# Altium PCB MOTHERBOARD.PcbDoc (part 1 of 3)
Units mil, origin at the board's own origin, x right, y up, seen from the top; angles counter-clockwise.
Board outline 7367.75 x 3037.04 mil, 4 copper layers (Top Layer, Top, Mid-Layer 1, Mid-Layer 2, Bottom Layer, Bottom), stack 18.2 mil thick; 247 components, 239 nets, 1097 pads, 323 vias.
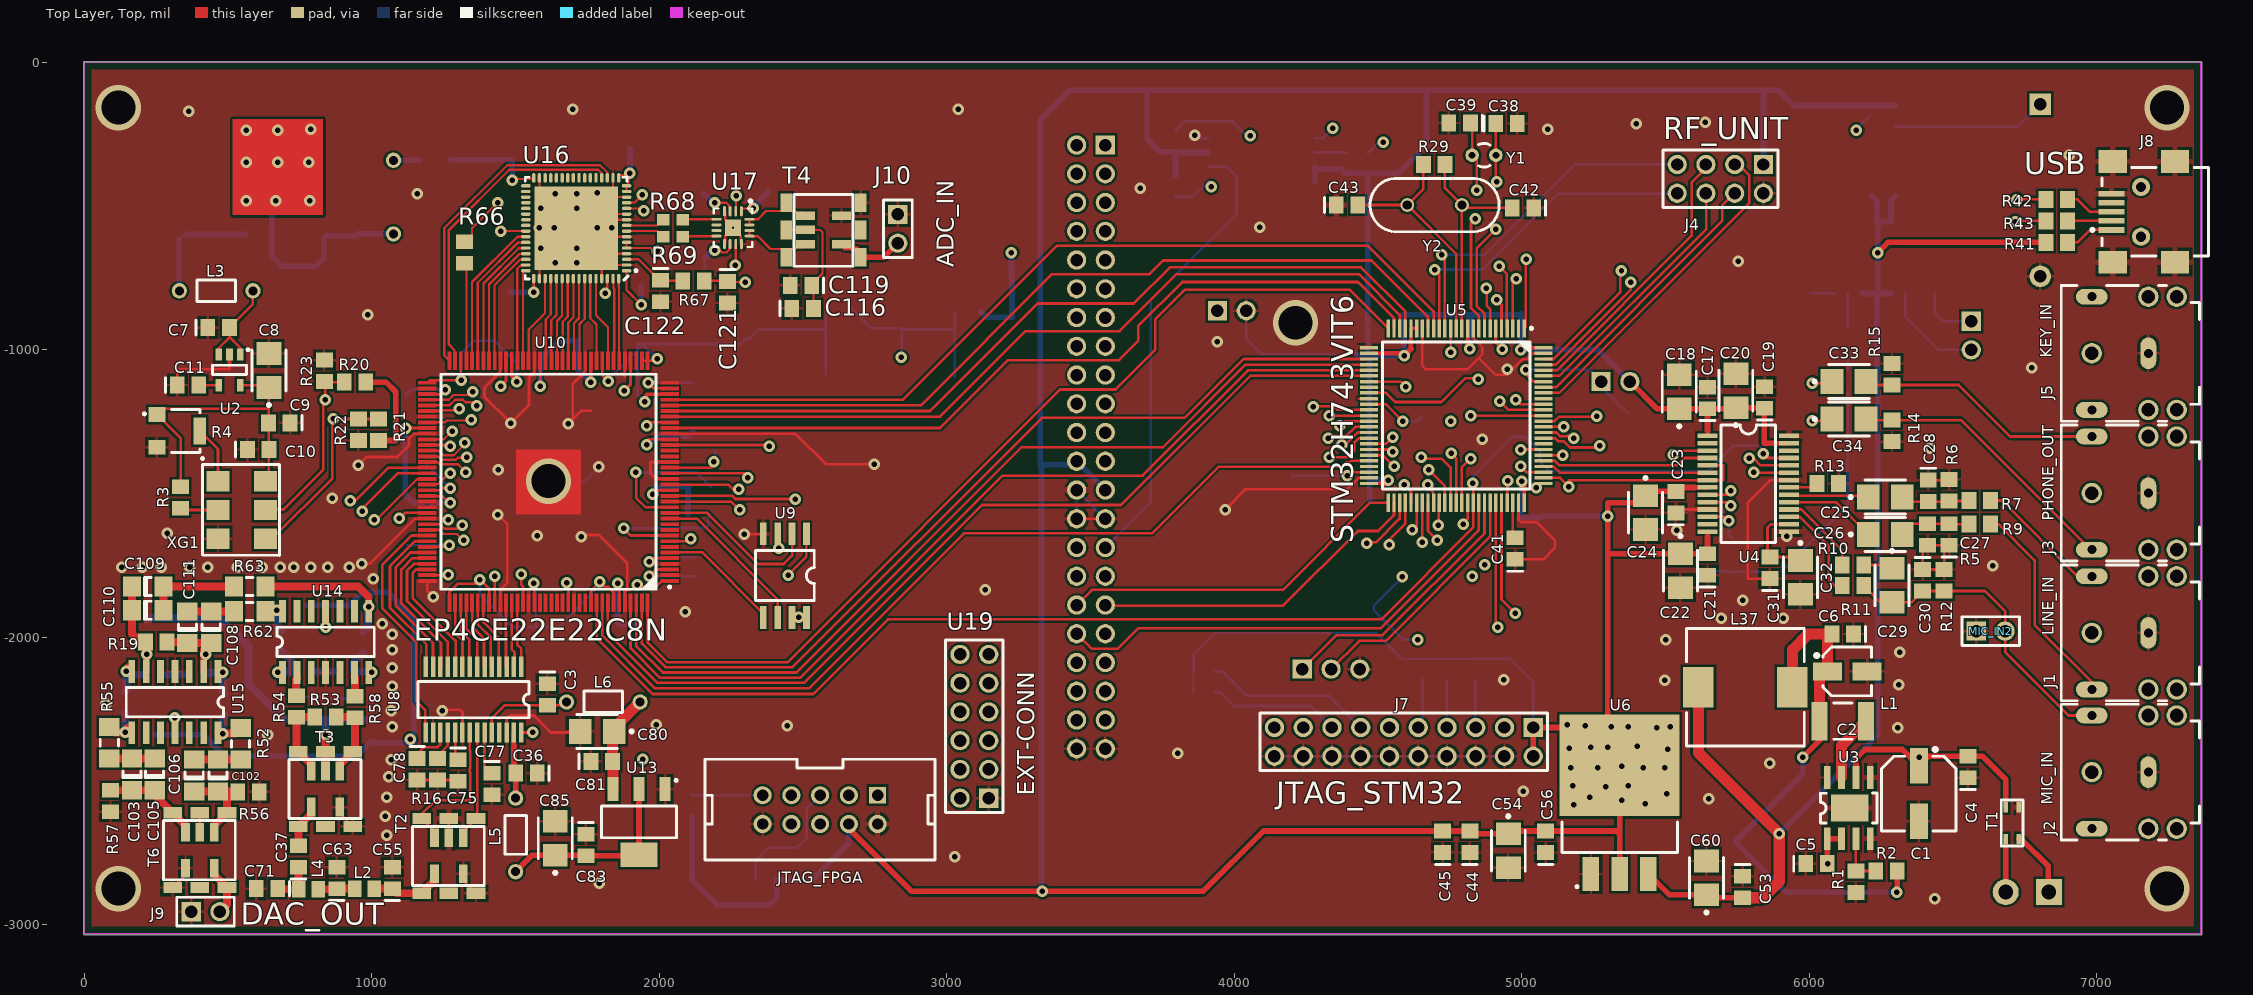
[diagram p0: Top Layer, Top view]
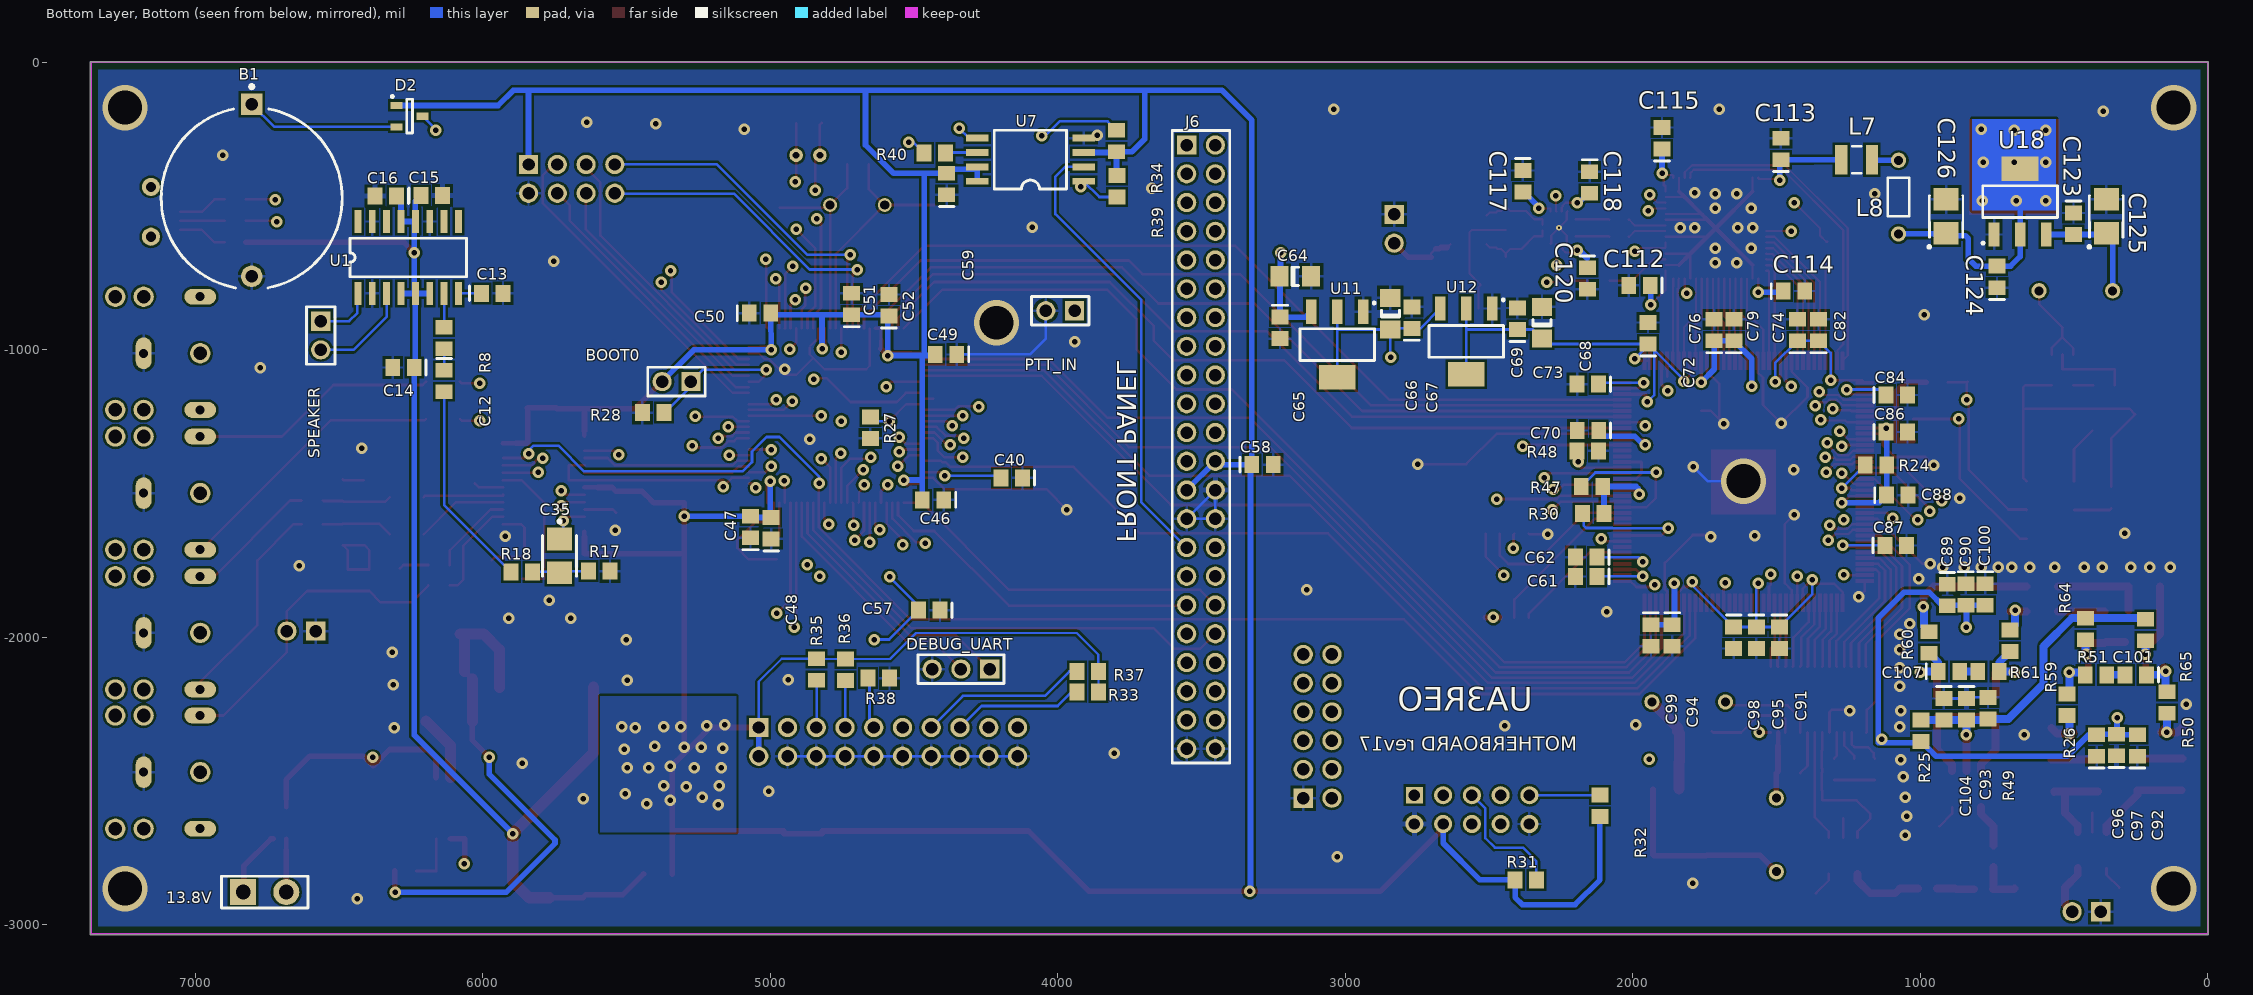
[diagram p1: Bottom Layer, Bottom view, seen from below]
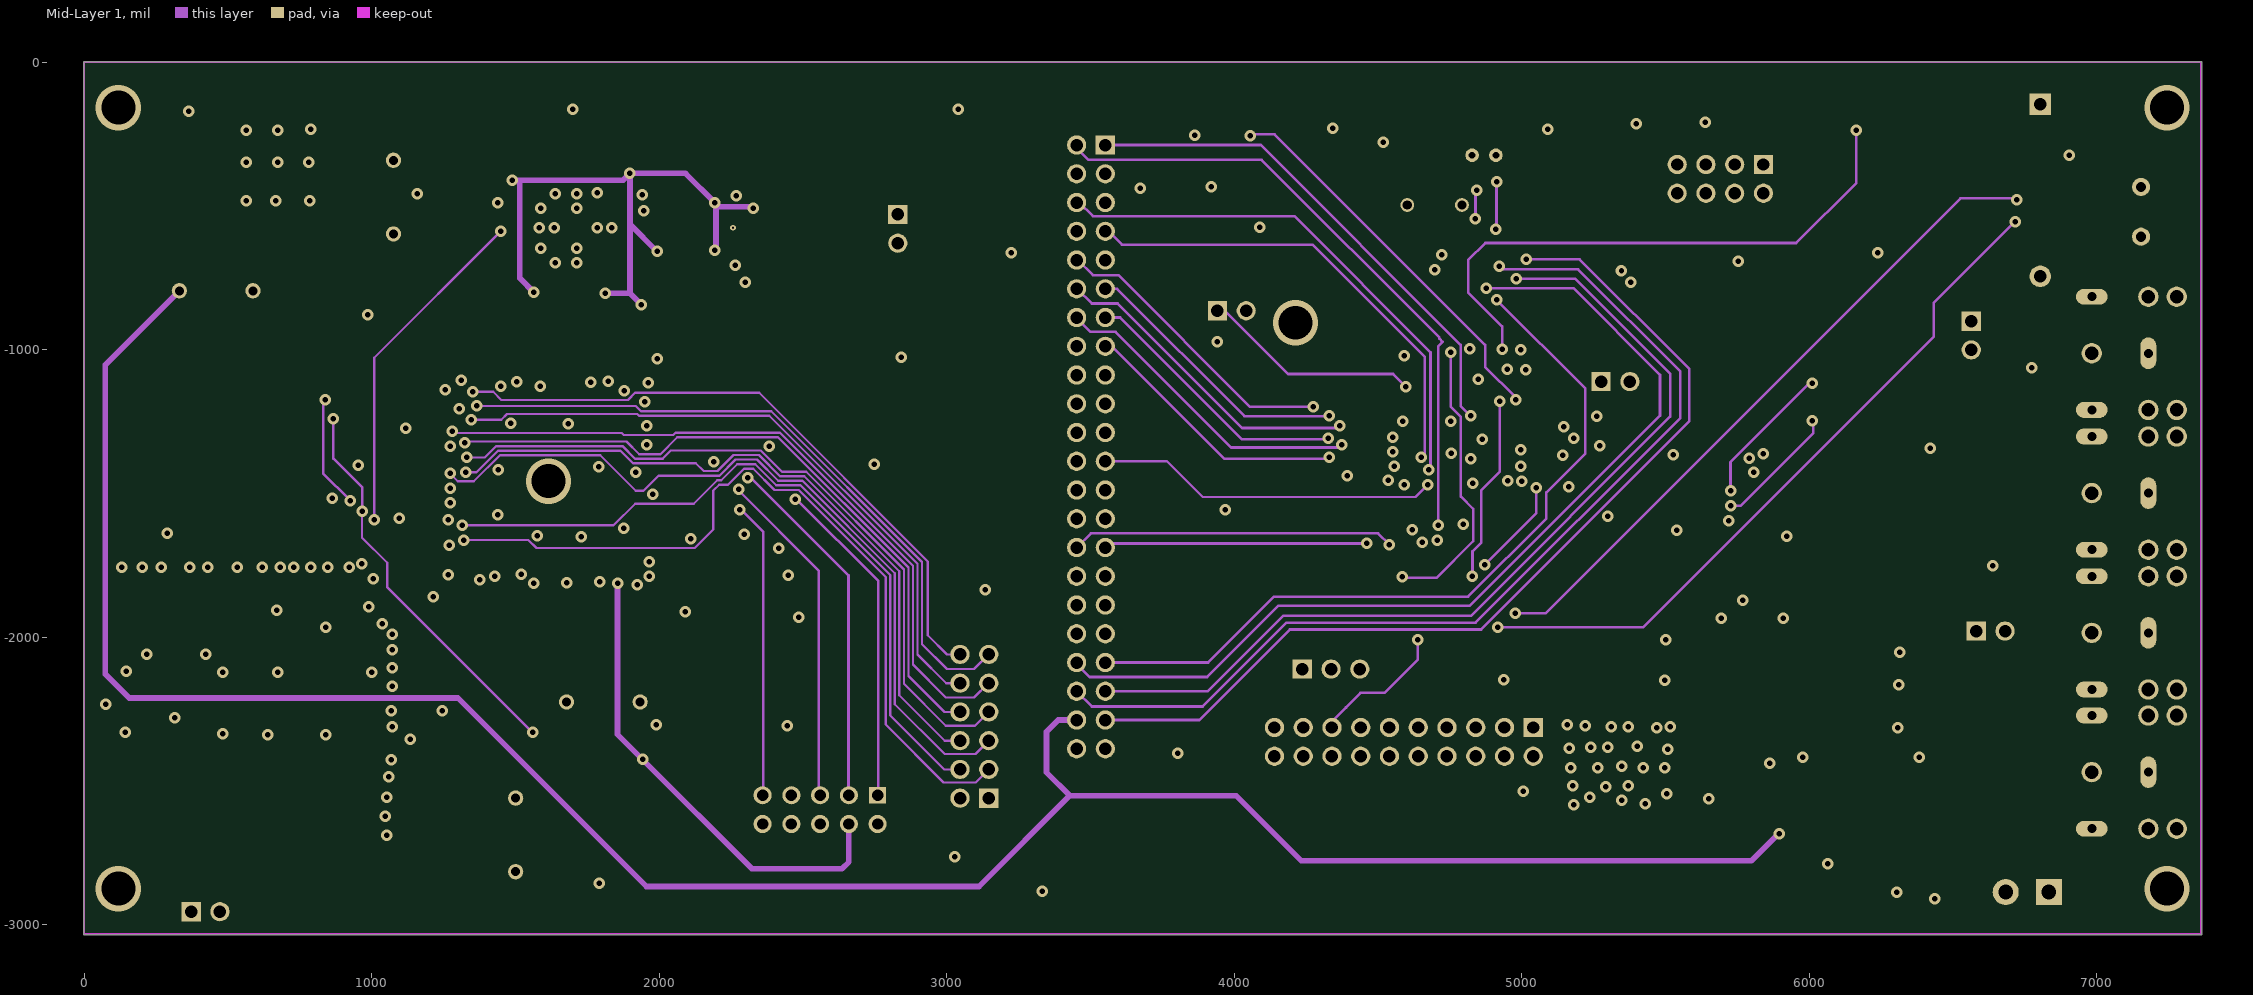
[diagram p2: Mid-Layer 1]
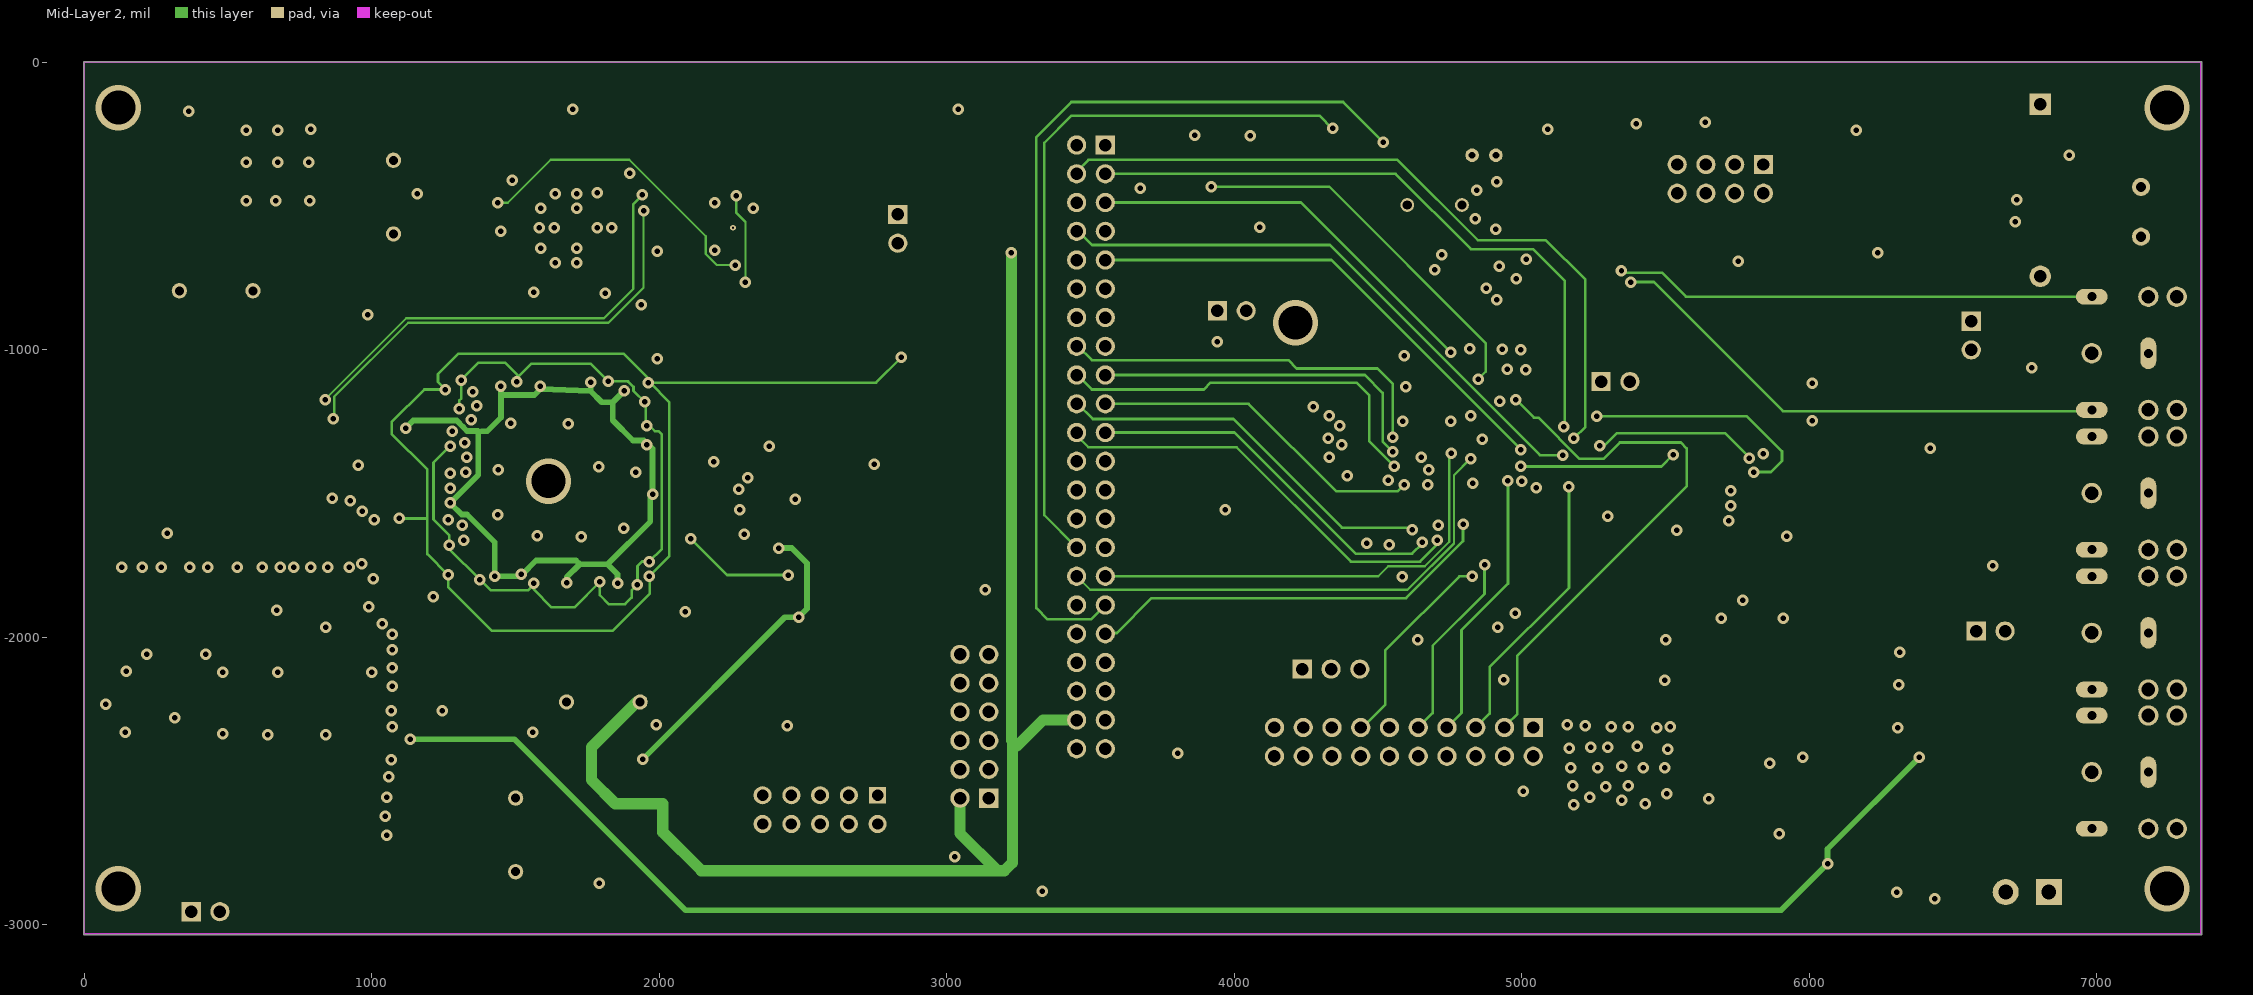
[diagram p3: Mid-Layer 2]

## Layer stack, top to bottom
Top Solder, Top Mask: solder mask 0.4, Solder Resist, Dk 3.5
Top Layer, Top: signal copper 1.4
Dielectric 1: dielectric 12.6, FR-4, Dk 4.8
Mid-Layer 1: signal copper 1.4
Mid-Layer 2: signal copper 1.4
Bottom Layer, Bottom: signal copper 1.4
Bottom Solder, Bot Mask: solder mask 0.4, Solder Resist, Dk 3.5

## Board outline
-2.77,-3031.5 ccw(c0,-3031.5) 0,-3034.27 7362.2,-3034.27 ccw(c7362.2,-3031.5) 7364.98,-3031.5 7364.98,0 ccw(c7362.2,0) 7362.2,2.77 0,2.77 ccw(c0,0) -2.77,0

## Design rules (kind name [scope] priority, off if disabled: settings)
BoardOutlineClearance [All] p1: gap=7.87 ignorepadtopadclearanceinfootprint=FALSE except(15.75: Arc-SplitBarrior Arc-SplitContinuation Track-SplitBarrior Track-SplitContinuation SMDPad-SplitBarrior SMDPad-SplitContinuation THPad-SplitBarrior THPad-SplitContinuation Via-SplitBarrior Via-SplitContinuation Fill-SplitBarrior Fill-SplitContinuation Poly-SplitBarrior Poly-SplitContinuation Region-SplitBarrior Region-SplitContinuation Text-SplitBarrior Text-SplitContinuation)
Clearance "Clearance Bottom Layer" [OnLayer('Bottom Layer')] p1: gap=8 ignorepadtopadclearanceinfootprint=TRUE except(10: Arc-Text Track-Text SMDPad-Text THPad-Text Via-Text Fill-Text Poly-Text Region-Text Text-Text)
Clearance "Clearance Top Layer" [OnLayer('Top Layer')] p2: gap=8 ignorepadtopadclearanceinfootprint=TRUE except(10: Arc-Text Track-Text SMDPad-Text THPad-Text Via-Text Fill-Text Poly-Text Region-Text Text-Text)
Clearance [All] p3: gap=7.87 ignorepadtopadclearanceinfootprint=FALSE except(3.5: Arc-Arc Arc-Track Arc-SMDPad Track-Track Track-SMDPad SMDPad-SMDPad; 5: Arc-Via Track-Via SMDPad-Via THPad-Via Via-Via; 10: Arc-Text Track-Text SMDPad-Text THPad-Text Via-Text Fill-Text Poly-Text Region-Text Text-Text)
HoleSize [All] p1: absolutevalues=TRUE maxlimit=248.03 minlimit=7.87 maxpercent=80.000 minpercent=20.000
MinimumAnnularRing [All] p1: minimumring=3
MinimumSolderMaskSliver [All] p1: minsoldermaskwidth=0.39
PolygonConnect PolygonConnect_1 [All] p1: thpad.connectstyle=Relief thpad.reliefconductorwidth=20 thpad.reliefentries=4 thpad.polygonreliefangle="90 Angle" thpad.airgapwidth=10 smdpad.connectstyle=Relief smdpad.reliefconductorwidth=20 smdpad.reliefentries=4 smdpad.polygonreliefangle="90 Angle" smdpad.airgapwidth=10 via.connectstyle=Direct via.reliefconductorwidth=20 via.reliefentries=4 via.polygonreliefangle="90 Angle" via.airgapwidth=10
RoutingCorners [All] p1: cornerstyle=Round minsetback=100 maxsetback=100
RoutingVias [All] p1: holewidth=19.68 width=39.37 viastyle="Through Hole" minholewidth=7.87 minwidth=17.72 maxholewidth=39.37 maxwidth=78.74
SilkToSilkClearance [All] p1: silktosilkclearance=0.39
SilkToSolderMaskClearance [IsPad] p1: minsilkscreentomaskgap=0.39 clearancetoexposedcopper=TRUE
SolderMaskExpansion [All] p1: expansion=4
Width [All] p1: maxlimit=100 minlimit=3.5 preferedwidth=15
25 further rules are at their usual default settings.

## Components (designator, comment, footprint, x,y, rotation, side; value= is the part's Value field where it differs from the comment)
13.8V "" JX2 6757.87,-2885.83 r180 bottom
B1 "CR1220" BR1632A/FA 6803.15,-428 r270 bottom
BOOT0 "" 51022-0200 5325.59,-1135.24 r0 bottom
C1 "4.7uF 16V" CAPAE_6.6x6.6h5.4 6380.58,-2539.94 r270 top
C2 "22uF 10V" CAPAE_4.3x4.3h5.4#1 6131.89,-2118.11 r0 top
C3 "100n" CAP_0805 1610.24,-2190.93 r270 top
C4 "100n" CAP_0805 6551.18,-2458.67 r90 top
C5 "100n" CAP_0805 6016.48,-2787.23 r0 top
C6 "100n" CAP_0805 6124.03,-1988.19 r180 top
C7 "1uF" CAP_0805 459,-922.36 r0 top
C8 "10uF 10V" CAPAE_4.3x4.3h5.4#2 641.73,-1087.32 r90 top
C9 "100n" CAP_0805 685.86,-1253.57 r180 top
C10 "470pf" CAP_0805 596.44,-1346.46 r0 top
C11 "1uF" CAP_0805 352.66,-1122.24 r0 top
C12 "1uF" CAP_0805 6133.86,-1100.38 r270 bottom
C13 "100n" CAP_0805 5974.42,-803.15 r180 bottom
C14 "1uF" CAP_0805 6267.28,-1061.22 r0 bottom
C15 "1uF" CAP_0805 6185.05,-462.6 r180 bottom
C16 "100n" CAP_0805 6328.73,-464.57 r0 bottom
C17 "100n" CAP_0805 5645.67,-1175.21 r90 top
C18 "10uF 10V" CAPAE_4.3x4.3h5.4#2 5547.24,-1161.42 r90 top
C19 "100n" CAP_0805 5844.49,-1173.24 r90 top
C20 "10uF 10V" CAPAE_4.3x4.3h5.4#2 5744.09,-1157.48 r90 top
C21 "100n" CAP_0805 5645.67,-1753.95 r90 top
C22 "10uF 10V" CAPAE_4.3x4.3h5.4#2 5551.18,-1751.97 r270 top
C23 "100n" CAP_0805 5535.43,-1537.41 r90 top
C24 "10uF 10V" CAPAE_4.3x4.3h5.4#2 5430,-1550 r270 top
C25 "1uF 10V" CAPAE_4.3x4.3h5.4#2 6248.03,-1511.81 r0 top
C26 "1uF 10V" CAPAE_4.3x4.3h5.4#2 6248.03,-1641.73 r0 top
C27 "220pF" CAP_0805 6486.22,-1649.62 r90 top
C28 "220pF" CAP_0805 6413.39,-1482.27 r270 top
C29 "1uF 10V" CAPAE_4.3x4.3h5.4#2 6287.4,-1803.15 r270 top
C30 "220pF" CAP_0805 6393.7,-1793.3 r270 top
C31 "100n" CAP_0805 5862.2,-1765.76 r90 top
C32 "10uF 10V" CAPAE_4.3x4.3h5.4#2 5968.5,-1775.59 r270 top
C33 "220uF 10V" CAPAE_4.3x4.3h5.4#2 6122.05,-1110.24 r0 top
C34 "220uF 10V" CAPAE_4.3x4.3h5.4#2 6122.05,-1240.16 r0 top
C35 "1uF 10V" CAPAE_4.3x4.3h5.4#2 5732.28,-1700.79 r270 bottom
C36 "100n" CAP_0805 1545.29,-2472.44 r180 top
C37 "100n" CAP_0805 744.09,-2769.7 r90 top
C38 "12pF" CAP_0805 4938.96,-212.6 r0 top
C39 "12pF" CAP_0805 4791.35,-210.63 r180 top
C40 "10uF" CAP_0805 4151.54,-1444.88 r0 bottom
C41 "10uF" CAP_0805 4976.38,-1698.83 r90 top
C42 "22pF" CAP_0805 5011.82,-505.91 r180 top
C43 "22pF" CAP_0805 4383.85,-496.06 r0 top
C44 "100nF" CAP_0805 4818.9,-2718.52 r90 top
C45 "100nF" CAP_0805 4724.48,-2718.39 r90 top
C46 "100nF" CAP_0805 4425.22,-1521.52 r0 bottom
C47 "100nF" CAP_0805 5068.06,-1624.23 r90 bottom
C48 "100nF" CAP_0805 4996.06,-1627.96 r90 bottom
C49 "100nF" CAP_0805 4379.91,-1015.75 r0 bottom
C50 "10uF" CAP_0805 5043.32,-872.05 r180 bottom value=1uF
C51 "100nF" CAP_0805 4716.54,-848.44 r90 bottom
C52 "10uF" CAP_0805 4586.61,-852.37 r90 bottom
C53 "100nF" CAP_0805 5767.72,-2860.22 r270 top
C54 "10uF 9V" CAPAE_4.3x4.3h5.4#2 4952.76,-2726.38 r270 top
C55 "120pf" CAP_0805 1070.87,-2844.5 r90 top
C56 "100nF" CAP_0805 5082.68,-2718.52 r90 top
C57 "100nF" CAP_0805 4438.76,-1905.25 r0 bottom
C58 "100nF" CAP_0805 3295.15,-1398.96 r180 bottom
C59 "100nF" CAP_0805 4385.63,-430.92 r90 bottom
C60 "10uF 9V" CAPAE_4.3x4.3h5.4#2 5641.73,-2852.36 r90 top
C61 "100n" CAP_0805 2153.56,-1787.98 r0 bottom
C62 "100n" CAP_0805 2153.56,-1721.06 r0 bottom
C63 "200pf" CAP_0805 877.95,-2844.5 r90 top
C64 "10uF" C0805 3173.23,-744.09 r180 bottom
C65 "100n" CAP_0805 3226.43,-915.37 r270 bottom
C66 "10uF" C0805 2842.52,-874.02 r90 bottom
C67 "100n" CAP_0805 2767.72,-895.66 r90 bottom
C68 "10uF" C0805 2314.96,-905.51 r90 bottom
C69 "100n" CAP_0805 2400.72,-899.59 r90 bottom
C70 "100n" CAP_0805 2147.09,-1280.24 r0 bottom
C71 "120pf" CAP_0805 642.48,-2874.02 r180 top
C72 "100n" CAP_0805 1946.19,-950.08 r90 bottom
C73 "100n" CAP_0805 2147.8,-1119.17 r0 bottom
C74 "100n" CAP_0805 1426.82,-938.94 r90 bottom
C75 "1uF" CAP_0805 1300,-2455 r270 top
C76 "100n" CAP_0805 1716.01,-938.94 r90 bottom
C77 "100n" CAP_0805 1417.32,-2501.96 r270 top
C78 "1uF" CAP_0805 1157.48,-2450.78 r270 top
C79 "100n" CAP_0805 1647.69,-938.94 r90 bottom
C80 "10uF" EEEFC_sizeB 1799.21,-2326.77 r180 top
C81 "100n" CAP_0805 1791.33,-2431.1 r0 top
C82 "100n" CAP_0805 1353.48,-938.94 r90 bottom
C83 "100n" CAP_0805 1744.09,-2714.56 r270 top
C84 "100n" CAP_0805 1088.9,-1156.91 r180 bottom
C85 "100uF" EEEFC_sizeB 1637.8,-2714.57 r90 top
C86 "100n" CAP_0805 1088.9,-1285.33 r180 bottom
C87 "100n" CAP_0805 1092.7,-1680.09 r180 bottom
C88 "100n" CAP_0805 1087,-1505.48 r180 bottom
C89 "100n" CAP_0805 905.51,-1844.48 r270 bottom
C90 "470p" CAP_0805 840.55,-1842.51 r270 bottom
C91 "100n" CAP_0805 1489.42,-1993.43 r270 bottom
C92 "1uF" CAP_0805 244.09,-2383.87 r90 bottom
C93 "100n" CAP_0805 838.58,-2242.11 r270 bottom
C94 "100n" CAP_0805 1862.65,-1985.07 r270 bottom
C95 "100n" CAP_0805 1569.56,-1993.43 r270 bottom
C96 "100n" CAP_0805 385.83,-2383.87 r90 bottom
C97 "470p" CAP_0805 316.93,-2381.9 r90 bottom
C98 "100n" CAP_0805 1648.42,-1993.43 r270 bottom
C99 "100n" CAP_0805 1936.11,-1985.07 r270 bottom
C100 "1uF" CAP_0805 773.62,-1842.51 r270 bottom
C101 "100n" CAP_0805 242.11,-2129.92 r0 bottom
C102 "1uF" CAP_1206 464.57,-2480.32 r90 top
C103 "1uF" CAP_1206 165.35,-2476.38 r90 top
C104 "470p" CAP_0805 917.32,-2242.11 r270 bottom
C105 "680pF" CAP_1206 244.09,-2476.38 r90 top
C106 "680pF" CAP_1206 381.89,-2480.32 r90 top
C107 "100n" CAP_0805 907.49,-2118.11 r180 bottom
C108 "1uF" CAP_1206 440.94,-1964.57 r90 top
C109 "1uF" CAP_1206 220.47,-1822.83 r0 top
C110 "680pF" CAP_1206 220.47,-1905.51 r0 top
C111 "680pF" CAP_1206 358.27,-1964.57 r90 top
C112 "CAP_0805" CAP_0805 1968.5,-775.59 r0 bottom value=100n
C113 "CAP_0805" CAP_0805 1484.25,-309.07 r90 bottom value=100n
C114 "CAP_0805" CAP_0805 1446.86,-795.28 r180 bottom value=100n
C115 "CAP_0805" CAP_0805 1897.64,-271.65 r90 bottom value=100n
C116 "CAP_0805" CAP_0805 2490.33,-855.39 r0 top value=470pF
C117 "CAP_0805" CAP_0805 2381.89,-405.51 r270 bottom value=100n
C118 "CAP_0805" CAP_0805 2149.61,-409.45 r270 bottom value=100n
C119 "CAP_0805" CAP_0805 2500,-775.59 r180 top value=1uF
C120 "CAP_0805" CAP_0805 2157.48,-744.09 r270 bottom value=100n
C121 "CAP_0805" CAP_0805 2236.22,-791.34 r270 top value=1uF
C122 "CAP_0805" CAP_0805 2003.94,-787.4 r270 top value=1uF
C123 "100n" CAP_0805 466.38,-553.14 r270 bottom
C124 "CAP_0805" CAP_0805 732.44,-753.77 r90 bottom value=100n
C125 "22uF" TC3528-1411 352.2,-535.43 r90 bottom
C126 "EEEFC_sizeB" TC3528-1411 909.45,-535.43 r90 bottom value=22uF
D2 "BAT54C" BAT54C 6254.81,-178.56 r180 bottom
DEBUG_UART "" 51022-0300 4336.22,-2135.24 r0 bottom
J1 "LINE_IN" SJ1-3523N 7159,-1984.25 r180 top
J2 "MIC_IN" SJ1-3523N 7159,-2468.5 r180 top
J3 "PHONE_OUT" SJ1-3523N 7159,-1498.03 r180 top
J4 "RF_UNIT" 90131-0124 5690.16,-405.12 r180 top
J5 "KEY_IN" SJ1-3523N 7159,-1011.81 r180 top
J6 "FRONT-UNIT" 90131-0142 3501.18,-1337.4 r270 bottom
J7 "JTAG_STM32" 90131-0130 4589.37,-2363.39 r180 top
J8 "USB" 2-1734035-3 7181.1,-519.69 r90 top
J9 "DAC_OUT" 644456-2 421.26,-2928.94 r0 top
J10 "ADC_IN" 644456-2 2854.33,-578.74 r270 top
JTAG_FPGA "" IDC10 2559.01,-2599 r0 top
L1 "3.3uH" IND_1812 6116.14,-2291.34 r180 top
L2 "330nH" IND_0805 974.41,-2874.02 r180 top
L3 "FB" IND_FERRITE_BEAD 458.13,-794.31 r0 top
L4 "330nH" IND_0805 779.53,-2875.98 r180 top
L5 "FB" IND_FERRITE_BEAD 1500,-2687.01 r270 top
L6 "FB" IND_FERRITE_BEAD 1805.12,-2224.41 r0 top
L7 "IND_1206" 14-1210 1220.47,-338.58 r0 bottom value=100uH
L8 "IND_FERRITE_BEAD" RES6.5-3.4X1.9 1074.8,-468.5 r90 bottom value=FB
L37 "10uH" IND_FERRITE_CORE 5777.56,-2173.23 r0 top
MIС_IN2 "" 51022-0200 6630.6,-1953.08 r0 top (schematic designator MI裚IN2)
PTT_IN "" 51022-0200 3991.04,-888.86 r0 bottom
R1 "10k" RES_0805 6161.85,-2849.73 r90 top
R2 "120k+100k" RES_0805 6268.09,-2812.04 r0 top
R3 "NONE" RES_0805 334.65,-1513.78 r270 top
R4 "1k" EVM1DSX30B 312.02,-1281.5 r0 top
R5 "5.6k" RES_0805 6411.42,-1641.73 r90 top
R6 "5.6k" RES_0805 6486.22,-1488.19 r270 top
R7 "5.6k" RES_0805 6592.52,-1523.62 r180 top
R8 "10k" RES_0805 6133.86,-958.66 r270 bottom
R9 "5.6k" RES_0805 6592.52,-1606.3 r180 top
R10 "10k" RES_0805 6151.57,-1748.03 r180 top
R11 "680" RES_0805 6151.57,-1818.9 r180 top
R12 "47k" RES_0805 6468.5,-1801.18 r270 top
R13 "10k" RES_0805 6064.09,-1464.73 r180 top
R14 "47k" RES_0805 6287.4,-1281.5 r90 top
R15 "47k" RES_0805 6287.4,-1084.65 r270 top
R16 "2k" RES_0805 1228.35,-2458.66 r90 top
R17 "47k" RES_0805 5594.49,-1769.69 r0 bottom
R18 "100" RES_0805 5864.17,-1771.65 r0 bottom
R19 "220" RES_0805 250,-2015.75 r0 top
R20 "127" RES_0805 940.94,-1112.2 r180 top
R21 "127" RES_0805 1023.62,-1277.56 r90 top
R22 "82.5" RES_0805 952.76,-1277.56 r270 top
R23 "82.5" RES_0805 834.65,-1072.83 r90 top
R24 "10k" RES_0805 1153.54,-1399.61 r0 bottom
R25 "1k" RES_0805 996.06,-2324.8 r270 bottom
R26 "470" RES_0805 488.19,-2234.25 r90 bottom
R27 "10k" RES_0805 4651.46,-1270.44 r90 bottom
R28 "10k" RES_0805 5406.74,-1218.37 r180 bottom
R29 "1m" RES_0805 4694.88,-354.33 r180 top
R30 "10k" RES_0805 2136.77,-1569.51 r180 bottom
R31 "10k" RES_0805 2371.83,-2843.27 r0 bottom
R32 "10k" RES_0805 2113.74,-2585.41 r270 bottom
R33 "10k" RES_0805 3895.16,-2190.63 r180 bottom
R34 "10k" RES_0805 3795.08,-273.43 r90 bottom
R35 "10k" RES_0805 4837.89,-2111.28 r270 bottom
R36 "10k" RES_0805 4738.38,-2112.46 r270 bottom
R37 "10k" RES_0805 3895.16,-2118.7 r0 bottom
R38 "10k" RES_0805 4622.05,-2141.73 r0 bottom
R39 "10k" RES_0805 3794,-430.6 r270 bottom
R40 "22" RES_0805 4426.97,-314.76 r0 bottom
R41 "0" RES_0805 6860.24,-625.98 r0 top
R42 "22" RES_0805 6860.24,-476.38 r180 top
R43 "22" RES_0805 6860.24,-551.18 r180 top
R47 "10k" RES_0805 2140.71,-1475.02 r180 bottom
R48 "10k" RES_0805 2155.98,-1350.81 r180 bottom
R49 "1k" RES_0805 763.78,-2246.06 r90 bottom
R50 "470" RES_0805 141.73,-2226.38 r90 bottom
R51 "330" RES_0805 387.8,-2129.92 r180 bottom
R52 "5.6" RES_1206 543.31,-2370.08 r90 top
R53 "220" RES_0805 838.58,-2277.56 r180 top
R54 "22" RES_0805 738.19,-2240.16 r90 top
R55 "5.6" RES_1206 86.61,-2366.14 r90 top
R56 "10k" RES_0805 570.87,-2537.4 r180 top
R57 "10k" RES_0805 90.55,-2568.9 r270 top
R58 "22" RES_0805 940.94,-2242.13 r270 top
R59 "470" RES_0805 687.01,-2011.81 r270 bottom
R60 "470" RES_0805 968.5,-2017.72 r270 bottom
R61 "330" RES_0805 761.81,-2118.11 r0 bottom
R62 "5.6" RES_1206 574.8,-1909.45 r0 top
R63 "5.6" RES_1206 574.8,-1822.83 r0 top
R64 "2k" RES_0805 425.2,-1970.47 r270 bottom
R65 "2k" RES_0805 216.54,-1974.41 r90 bottom
R66 "RES_0805" RES_0805 1322.83,-661.42 r270 top value=1.5k
R67 "RES_0805" RES_0805 2118.11,-759.84 r180 top value=56
R68 "RES_0603" RES_0603 2047.24,-547.24 r180 top value=10
R69 "RES_0603" RES_0603 2047.24,-606.3 r180 top value=10
SPEAKER "" 51022-0200 6537.99,-950 r270 bottom
T1 "ACP3225-501-2P-T" TRANSF_ICORE 6705.12,-2645.28 r270 top
T2 "1:1 T1-6T" TRANSF_ACORE2 1267.72,-2759.84 r270 top
T3 "1:1 ADT1-6T" TRANSF_ACORE2_1 838.58,-2527.56 r270 top
T4 "TRANSF_ACORE2" TRANSF_ACORE2 2570.87,-582.68 r0 top value="1:4 ADT4-6T"
T6 "1:1 ADT1-1" TRANSF_ACORE 401.57,-2740.16 r270 top
U1 "PAM8403" PAM8403 6258.86,-678.54 r90 bottom
U2 "LD3985" LD3985 510.95,-1067.82 r270 top
U3 "ST1S10" ST1S10 6136.85,-2593.47 r90 top
U4 "WM8731" WM8731 5787.41,-1465.55 r0 top
U5 "STM32H743VIT6" STM32H743VIT6 4771.65,-1228.35 r270 top
U6 "LM1085-3.3" LM1085-3.3 5340.16,-2574.8 r90 top
U7 "W25Q16" W25Q16 4094.49,-338.39 r0 bottom
U8 "DAC904E" DAC904E 1353.35,-2216.54 r270 top
U9 "25P80" 25P80 2436.44,-1784.94 r270 top
U10 "EP4CE22E22C8N" EP4CE22E22C8N 1614.17,-1458.66 r180 top
U11 "2V5" AMS1117 3024.22,-981.41 r270 bottom value=AMS1117-2V5
U12 "1V2" AMS1117 2575.41,-970.27 r270 bottom value=AMS1117-1V2
U13 "LD1117-3.3" LT1117CST-3.3 1932.47,-2641.73 r270 top
U14 "OPA2674I" OPA2674I 838.98,-2015.75 r90 top
U15 "OPA2674I" OPA2674I 314.96,-2224.8 r270 top
U16 "LTC2208CUP" LTC2208CUP 1722.56,-576.77 r180 top
U17 "LTC6400IUD-20#PBF" LT-UD-16_N 2255.91,-574.8 r270 top
U18 "LD1117-3.3" LT1117CST-3.3 655.35,-484.25 r90 bottom
U19 "EXT-CONN" EXT-CONN 3095.67,-2309.06 r90 top
XG1 "122.88Mhz" NV7050SA 541.25,-1542.13 r0 top
Y1 "32.768k" R26-32.768 4868.11,-322.83 r90 top
Y2 "8mhz" ECS-200-20-1 4696.34,-496.06 r180 top

## Footprints (in the part's own frame and the unit in brackets; to place one, negate y for a bottom-side part, rotate by r counter-clockwise, add the part's x,y. Pads: shape width x height; smd on the part's side, far side on the other; paste and mask are expansions set on the pad)
2-1734035-3 [mm]
  rect 0.5x2.3 smd: 1(-1.6,3.3) 2(-0.8,3.3) 3(0,3.3) 4(0.8,3.3) 5(1.6,3.3)
  rect 2x2.5 smd: 6(-4.45,3.2) 7(4.45,3.2) 8(-4.45,-2.3) 9(4.45,-2.3)
  round 1.6 hole 0.9: 10(-2.2,0.7) 11(2.201,0.7)
  silkscreen extent -3.9,-5.25 3.9,5.25
14-1210 [mm] "Chip Resistor, Body 3.2x2.5mm, IPC High Density"
  rect 1.1x2.6 smd: 1(-1.35,0) 2(1.35,0)
  silkscreen extent -0.4,-1.2 0.4,1.2, body extent -1.68,-1.32 1.68,1.32, height 0.9
25P80 [mm]
  rect 2x0.6 smd: 1(-3.7,1.905) 2(-3.7,0.635) 3(-3.7,-0.635) 4(-3.7,-1.905) 5(3.7,-1.905) 6(3.7,-0.635) 7(3.7,0.635) 8(3.7,1.905)
  silkscreen extent -2.2,-2.6 2.2,2.6
51022-0200 [mm]
  rect 1.7x1.7 hole 1.1: 1(-1.27,-0.635)
  round 1.7 hole 1.1: 2(1.27,-0.635)
  silkscreen extent -2.54,-1.91 2.54,0.64
51022-0300 [mm]
  rect 1.7x1.7 hole 1.1: 1(-2.54,-0.635)
  round 1.7 hole 1.1: 2(0,-0.635) 3(2.54,-0.635)
  silkscreen extent -3.81,-1.91 3.81,0.64
90131-0124 [mm]
  rect 1.7x1.7 hole 1.1: 1(-3.81,-1.27)
  round 1.7 hole 1.1: 2(-3.81,1.27) 3(-1.27,-1.27) 4(-1.27,1.27) 5(1.27,-1.27) 6(1.27,1.27) 7(3.81,-1.27) 8(3.81,1.27)
  silkscreen extent -5.08,-2.54 5.08,2.54
90131-0130 [mm]
  rect 1.7x1.7 hole 1.1: 1(-11.43,-1.27)
  round 1.7 hole 1.1: 2(-11.43,1.27) 3(-8.89,-1.27) 4(-8.89,1.27) 5(-6.35,-1.27) 6(-6.35,1.27) 7(-3.81,-1.27) 8(-3.81,1.27) 9(-1.27,-1.27) 10(-1.27,1.27) 11(1.27,-1.27) 12(1.27,1.27) 13(3.81,-1.27) 14(3.81,1.27) 15(6.35,-1.27) 16(6.35,1.27) 17(8.89,-1.27) 18(8.89,1.27) 19(11.43,-1.27) 20(11.43,1.27)
  silkscreen extent -12.7,-2.54 12.7,2.54
90131-0142 [mm]
  rect 1.7x1.7 hole 1.1: 1(-26.67,-1.27)
  round 1.7 hole 1.1: 2(-26.67,1.27) 3(-24.13,-1.27) 4(-24.13,1.27) 5(-21.59,-1.27) 6(-21.59,1.27) 7(-19.05,-1.27) 8(-19.05,1.27) 9(-16.51,-1.27) 10(-16.51,1.27) 11(-13.97,-1.27) 12(-13.97,1.27) 13(-11.43,-1.27) 14(-11.43,1.27) 15(-8.89,-1.27) 16(-8.89,1.27) 17(-6.35,-1.27) 18(-6.35,1.27) 19(-3.81,-1.27) 20(-3.81,1.27) 21(-1.27,-1.27) 22(-1.27,1.27) 23(1.27,-1.27) 24(1.27,1.27) 25(3.81,-1.27) 26(3.81,1.27) 27(6.35,-1.27) 28(6.35,1.27) 29(8.89,-1.27) 30(8.89,1.27) 31(11.43,-1.27) 32(11.43,1.27) 33(13.97,-1.27) 34(13.97,1.27) 35(16.51,-1.27) 36(16.51,1.27) 37(19.05,-1.27) 38(19.05,1.27) 39(21.59,-1.27) 40(21.59,1.27) 41(24.13,-1.27) 42(24.13,1.27) 43(26.67,-1.27) 44(26.67,1.27)
  silkscreen extent -27.94,-2.54 27.94,2.54
644456-2 [mm]
  rect 1.7x1.7 hole 1.1: 1(-1.27,-0.635)
  round 1.7 hole 1.1: 2(1.27,-0.635)
  silkscreen extent -2.54,-1.91 2.54,0.64
AMS1117 [mm]
  rect 2.15x0.95 smd: 1(-2.9,2.215) 2(-2.9,-0.085) 3(-2.9,-2.385)
  rect 2.15x3.25 smd: 4(2.9,-0.085)
  silkscreen extent -3.86,-3.38 1.4,3.38
BAT54C [mm]
  rect 1.05x0.65 smd: 1(-1.128,0.735) 2(-1.128,-1.165) 3(1.172,-0.215)
  silkscreen extent -1.7,-1.71 0.27,1.71
BR1632A/FA [mm]
  rect 1.9x1.9 hole 1.1: 1(-7.171,0)
  round 1.9 hole 1.1: 2(8.029,0)
  silkscreen extent -9.03,-8 9.04,8
C0805 [mm]
  rect 1.6x1.8 smd: 1(-1.4,0) 2(1.4,0)
  silkscreen extent -0.3,-0.8 0.3,0.8
CAP_0805 [mm]
  rect 1.3x1.5 smd: 1(-0.75,0) 2(1.15,0)
  silkscreen extent -1.8,-0.65 -1.8,0.65
CAP_1206 [mm]
  rect 1.6x1.8 smd: 1(-1.4,0) 2(1.4,0)
  silkscreen extent -0.3,-0.8 0.3,0.8
CAPAE_4.3x4.3h5.4#1 [mm]
  rect 2.55x1.6 smd: 1(-1.75,0) 2(1.75,0)
  silkscreen extent -3,-2.15 2.15,2.15
CAPAE_4.3x4.3h5.4#2 [mm]
  rect 2x2.2 smd: 1(-1.1,0) 2(1.9,0)
  silkscreen extent -2.9,-1.5 2.2,1.5
CAPAE_6.6x6.6h5.4 [mm]
  rect 3.15x1.6 smd: 1(-2.362,0) 2(2.538,0)
  silkscreen extent -4.11,-3.3 3.39,3.3
DAC904E [mm]
  rect 1.8x0.4 smd: 1(-2.9,4.225) 2(-2.9,3.575) 3(-2.9,2.925) 4(-2.9,2.275) 5(-2.9,1.625) 6(-2.9,0.975) 7(-2.9,0.325) 8(-2.9,-0.325) 9(-2.9,-0.975) 10(-2.9,-1.625) 11(-2.9,-2.275) 12(-2.9,-2.925) 13(-2.9,-3.575) 14(-2.9,-4.225) 15(2.9,-4.225) 16(2.9,-3.575) 17(2.9,-2.925) 18(2.9,-2.275) 19(2.9,-1.625) 20(2.9,-0.975) 21(2.9,-0.325) 22(2.9,0.325) 23(2.9,0.975) 24(2.9,1.625) 25(2.9,2.275) 26(2.9,2.925) 27(2.9,3.575) 28(2.9,4.225)
  silkscreen extent -1.6,-4.9 1.6,4.9
ECS-200-20-1 [mil]
  round 48 hole 32: 1(-95,0) 2(95,0)
  silkscreen extent -225,-93 225,93
EEEFC_sizeB [mm]
  rect 2x2.2 smd: 1(-1.1,0) 2(1.9,0)
  silkscreen extent -2.9,-1.5 2.2,1.5
EP4CE22E22C8N [mm]
  round 0 smd paste-25.4 mask-25.4: 1(-10.7,8.75) 2(-10.7,8.25) 3(-10.7,7.75) 4(-10.7,7.25) 5(-10.7,6.75) 6(-10.7,6.25) 7(-10.7,5.75) 8(-10.7,5.25) 9(-10.7,4.75) 10(-10.7,4.25) 11(-10.7,3.75) 12(-10.7,3.25) 13(-10.7,2.75) 14(-10.7,2.25) 15(-10.7,1.75) 16(-10.7,1.25) 17(-10.7,0.75) 18(-10.7,0.25) 19(-10.7,-0.25) 20(-10.7,-0.75) 21(-10.7,-1.25) 22(-10.7,-1.75) 23(-10.7,-2.25) 24(-10.7,-2.75) 25(-10.7,-3.25) 26(-10.7,-3.75) 27(-10.7,-4.25) 28(-10.7,-4.75) 29(-10.7,-5.25) 30(-10.7,-5.75) 31(-10.7,-6.25) 32(-10.7,-6.75) 33(-10.7,-7.25) 34(-10.7,-7.75) 35(-10.7,-8.25) 36(-10.7,-8.75) 37(-8.75,-10.7) 38(-8.25,-10.7) 39(-7.75,-10.7) 40(-7.25,-10.7) 41(-6.75,-10.7) 42(-6.25,-10.7) 43(-5.75,-10.7) 44(-5.25,-10.7) 45(-4.75,-10.7) 46(-4.25,-10.7) 47(-3.75,-10.7) 48(-3.25,-10.7) 49(-2.75,-10.7) 50(-2.25,-10.7) 51(-1.75,-10.7) 52(-1.25,-10.7) 53(-0.75,-10.7) 54(-0.25,-10.7) 55(0.25,-10.7) 56(0.75,-10.7) 57(1.25,-10.7) 58(1.75,-10.7) 59(2.25,-10.7) 60(2.75,-10.7) 61(3.25,-10.7) 62(3.75,-10.7) 63(4.25,-10.7) 64(4.75,-10.7) 65(5.25,-10.7) 66(5.75,-10.7) 67(6.25,-10.7) 68(6.75,-10.7) 69(7.25,-10.7) 70(7.75,-10.7) 71(8.25,-10.7) 72(8.75,-10.7) 73(10.7,-8.75) 74(10.7,-8.25) 75(10.7,-7.75) 76(10.7,-7.25) 77(10.7,-6.75) 78(10.7,-6.25) 79(10.7,-5.75) 80(10.7,-5.25) 81(10.7,-4.75) 82(10.7,-4.25) 83(10.7,-3.75) 84(10.7,-3.25) 85(10.7,-2.75) 86(10.7,-2.25) 87(10.7,-1.75) 88(10.7,-1.25) 89(10.7,-0.75) 90(10.7,-0.25) 91(10.7,0.25) 92(10.7,0.75) 93(10.7,1.25) 94(10.7,1.75) 95(10.7,2.25) 96(10.7,2.75) 97(10.7,3.25) 98(10.7,3.75) 99(10.7,4.25) 100(10.7,4.75) 101(10.7,5.25) 102(10.7,5.75) 103(10.7,6.25) 104(10.7,6.75) 105(10.7,7.25) 106(10.7,7.75) 107(10.7,8.25) 108(10.7,8.75) 109(8.75,10.7) 110(8.25,10.7) 111(7.75,10.7) 112(7.25,10.7) 113(6.75,10.7) 114(6.25,10.7) 115(5.75,10.7) 116(5.25,10.7) 117(4.75,10.7) 118(4.25,10.7) 119(3.75,10.7) 120(3.25,10.7) 121(2.75,10.7) 122(2.25,10.7) 123(1.75,10.7) 124(1.25,10.7) 125(0.75,10.7) 126(0.25,10.7) 127(-0.25,10.7) 128(-0.75,10.7) 129(-1.25,10.7) 130(-1.75,10.7) 131(-2.25,10.7) 132(-2.75,10.7) 133(-3.25,10.7) 134(-3.75,10.7) 135(-4.25,10.7) 136(-4.75,10.7) 137(-5.25,10.7) 138(-5.75,10.7) 139(-6.25,10.7) 140(-6.75,10.7) 141(-7.25,10.7) 142(-7.75,10.7) 143(-8.25,10.7) 144(-8.75,10.7) 145(0,0)
  Top Layer, Top region: -11.5,8.6 -11.5,8.9 -9.9,8.9 -9.9,8.6
  Top Layer, Top region: -11.5,8.1 -11.5,8.4 -9.9,8.4 -9.9,8.1
  Top Layer, Top region: -11.5,7.6 -11.5,7.9 -9.9,7.9 -9.9,7.6
  Top Layer, Top region: -11.5,7.1 -11.5,7.4 -9.9,7.4 -9.9,7.1
  Top Layer, Top region: -11.5,6.6 -11.5,6.9 -9.9,6.9 -9.9,6.6
  Top Layer, Top region: -11.5,6.1 -11.5,6.4 -9.9,6.4 -9.9,6.1
  Top Layer, Top region: -11.5,5.6 -11.5,5.9 -9.9,5.9 -9.9,5.6
  Top Layer, Top region: -11.5,5.1 -11.5,5.4 -9.9,5.4 -9.9,5.1
  Top Layer, Top region: -11.5,4.6 -11.5,4.9 -9.9,4.9 -9.9,4.6
  Top Layer, Top region: -11.5,4.1 -11.5,4.4 -9.9,4.4 -9.9,4.1
  Top Layer, Top region: -11.5,3.6 -11.5,3.9 -9.9,3.9 -9.9,3.6
  Top Layer, Top region: -11.5,3.1 -11.5,3.4 -9.9,3.4 -9.9,3.1
  Top Layer, Top region: -11.5,2.6 -11.5,2.9 -9.9,2.9 -9.9,2.6
  Top Layer, Top region: -11.5,2.1 -11.5,2.4 -9.9,2.4 -9.9,2.1
  Top Layer, Top region: -11.5,1.6 -11.5,1.9 -9.9,1.9 -9.9,1.6
  Top Layer, Top region: -11.5,1.1 -11.5,1.4 -9.9,1.4 -9.9,1.1
  Top Layer, Top region: -11.5,0.6 -11.5,0.9 -9.9,0.9 -9.9,0.6
  Top Layer, Top region: -11.5,0.1 -11.5,0.4 -9.9,0.4 -9.9,0.1
  Top Layer, Top region: -11.5,-0.4 -11.5,-0.1 -9.9,-0.1 -9.9,-0.4
  Top Layer, Top region: -11.5,-0.9 -11.5,-0.6 -9.9,-0.6 -9.9,-0.9
  Top Layer, Top region: -11.5,-1.4 -11.5,-1.1 -9.9,-1.1 -9.9,-1.4
  Top Layer, Top region: -11.5,-1.9 -11.5,-1.6 -9.9,-1.6 -9.9,-1.9
  Top Layer, Top region: -11.5,-2.4 -11.5,-2.1 -9.9,-2.1 -9.9,-2.4
  Top Layer, Top region: -11.5,-2.9 -11.5,-2.6 -9.9,-2.6 -9.9,-2.9
  Top Layer, Top region: -11.5,-3.4 -11.5,-3.1 -9.9,-3.1 -9.9,-3.4
  Top Layer, Top region: -11.5,-3.9 -11.5,-3.6 -9.9,-3.6 -9.9,-3.9
  Top Layer, Top region: -11.5,-4.4 -11.5,-4.1 -9.9,-4.1 -9.9,-4.4
  Top Layer, Top region: -11.5,-4.9 -11.5,-4.6 -9.9,-4.6 -9.9,-4.9
  Top Layer, Top region: -11.5,-5.4 -11.5,-5.1 -9.9,-5.1 -9.9,-5.4
  Top Layer, Top region: -11.5,-5.9 -11.5,-5.6 -9.9,-5.6 -9.9,-5.9
  Top Layer, Top region: -11.5,-6.4 -11.5,-6.1 -9.9,-6.1 -9.9,-6.4
  Top Layer, Top region: -11.5,-6.9 -11.5,-6.6 -9.9,-6.6 -9.9,-6.9
  Top Layer, Top region: -11.5,-7.4 -11.5,-7.1 -9.9,-7.1 -9.9,-7.4
  Top Layer, Top region: -11.5,-7.9 -11.5,-7.6 -9.9,-7.6 -9.9,-7.9
  Top Layer, Top region: -11.5,-8.4 -11.5,-8.1 -9.9,-8.1 -9.9,-8.4
  Top Layer, Top region: -11.5,-8.9 -11.5,-8.6 -9.9,-8.6 -9.9,-8.9
  Top Layer, Top region: -8.9,-9.9 -8.6,-9.9 -8.6,-11.5 -8.9,-11.5
  Top Layer, Top region: -8.4,-9.9 -8.1,-9.9 -8.1,-11.5 -8.4,-11.5
  Top Layer, Top region: -7.9,-9.9 -7.6,-9.9 -7.6,-11.5 -7.9,-11.5
  Top Layer, Top region: -7.4,-9.9 -7.1,-9.9 -7.1,-11.5 -7.4,-11.5
  Top Layer, Top region: -6.9,-9.9 -6.6,-9.9 -6.6,-11.5 -6.9,-11.5
  Top Layer, Top region: -6.4,-9.9 -6.1,-9.9 -6.1,-11.5 -6.4,-11.5
  Top Layer, Top region: -5.9,-9.9 -5.6,-9.9 -5.6,-11.5 -5.9,-11.5
  Top Layer, Top region: -5.4,-9.9 -5.1,-9.9 -5.1,-11.5 -5.4,-11.5
  Top Layer, Top region: -4.9,-9.9 -4.6,-9.9 -4.6,-11.5 -4.9,-11.5
  Top Layer, Top region: -4.4,-9.9 -4.1,-9.9 -4.1,-11.5 -4.4,-11.5
  Top Layer, Top region: -3.9,-9.9 -3.6,-9.9 -3.6,-11.5 -3.9,-11.5
  Top Layer, Top region: -3.4,-9.9 -3.1,-9.9 -3.1,-11.5 -3.4,-11.5
  Top Layer, Top region: -2.9,-9.9 -2.6,-9.9 -2.6,-11.5 -2.9,-11.5
  Top Layer, Top region: -2.4,-9.9 -2.1,-9.9 -2.1,-11.5 -2.4,-11.5
  Top Layer, Top region: -1.9,-9.9 -1.6,-9.9 -1.6,-11.5 -1.9,-11.5
  Top Layer, Top region: -1.4,-9.9 -1.1,-9.9 -1.1,-11.5 -1.4,-11.5
  Top Layer, Top region: -0.9,-9.9 -0.6,-9.9 -0.6,-11.5 -0.9,-11.5
  Top Layer, Top region: -0.4,-9.9 -0.1,-9.9 -0.1,-11.5 -0.4,-11.5
  Top Layer, Top region: 0.1,-9.9 0.4,-9.9 0.4,-11.5 0.1,-11.5
  Top Layer, Top region: 0.6,-9.9 0.9,-9.9 0.9,-11.5 0.6,-11.5
  Top Layer, Top region: 1.1,-9.9 1.4,-9.9 1.4,-11.5 1.1,-11.5
  Top Layer, Top region: 1.6,-9.9 1.9,-9.9 1.9,-11.5 1.6,-11.5
  Top Layer, Top region: 2.1,-9.9 2.4,-9.9 2.4,-11.5 2.1,-11.5
  Top Layer, Top region: 2.6,-9.9 2.9,-9.9 2.9,-11.5 2.6,-11.5
  Top Layer, Top region: 3.1,-9.9 3.4,-9.9 3.4,-11.5 3.1,-11.5
  Top Layer, Top region: 3.6,-9.9 3.9,-9.9 3.9,-11.5 3.6,-11.5
  Top Layer, Top region: 4.1,-9.9 4.4,-9.9 4.4,-11.5 4.1,-11.5
  Top Layer, Top region: 4.6,-9.9 4.9,-9.9 4.9,-11.5 4.6,-11.5
  Top Layer, Top region: 5.1,-9.9 5.4,-9.9 5.4,-11.5 5.1,-11.5
  Top Layer, Top region: 5.6,-9.9 5.9,-9.9 5.9,-11.5 5.6,-11.5
  Top Layer, Top region: 6.1,-9.9 6.4,-9.9 6.4,-11.5 6.1,-11.5
  Top Layer, Top region: 6.6,-9.9 6.9,-9.9 6.9,-11.5 6.6,-11.5
  Top Layer, Top region: 7.1,-9.9 7.4,-9.9 7.4,-11.5 7.1,-11.5
  Top Layer, Top region: 7.6,-9.9 7.9,-9.9 7.9,-11.5 7.6,-11.5
  Top Layer, Top region: 8.1,-9.9 8.4,-9.9 8.4,-11.5 8.1,-11.5
  Top Layer, Top region: 8.6,-9.9 8.9,-9.9 8.9,-11.5 8.6,-11.5
  Top Layer, Top region: 9.9,-8.9 9.9,-8.6 11.5,-8.6 11.5,-8.9
  Top Layer, Top region: 9.9,-8.4 9.9,-8.1 11.5,-8.1 11.5,-8.4
  Top Layer, Top region: 9.9,-7.9 9.9,-7.6 11.5,-7.6 11.5,-7.9
  Top Layer, Top region: 9.9,-7.4 9.9,-7.1 11.5,-7.1 11.5,-7.4
  Top Layer, Top region: 9.9,-6.9 9.9,-6.6 11.5,-6.6 11.5,-6.9
  Top Layer, Top region: 9.9,-6.4 9.9,-6.1 11.5,-6.1 11.5,-6.4
  Top Layer, Top region: 9.9,-5.9 9.9,-5.6 11.5,-5.6 11.5,-5.9
  Top Layer, Top region: 9.9,-5.4 9.9,-5.1 11.5,-5.1 11.5,-5.4
  Top Layer, Top region: 9.9,-4.9 9.9,-4.6 11.5,-4.6 11.5,-4.9
  Top Layer, Top region: 9.9,-4.4 9.9,-4.1 11.5,-4.1 11.5,-4.4
  Top Layer, Top region: 9.9,-3.9 9.9,-3.6 11.5,-3.6 11.5,-3.9
  Top Layer, Top region: 9.9,-3.4 9.9,-3.1 11.5,-3.1 11.5,-3.4
  Top Layer, Top region: 9.9,-2.9 9.9,-2.6 11.5,-2.6 11.5,-2.9
  Top Layer, Top region: 9.9,-2.4 9.9,-2.1 11.5,-2.1 11.5,-2.4
  Top Layer, Top region: 9.9,-1.9 9.9,-1.6 11.5,-1.6 11.5,-1.9
  Top Layer, Top region: 9.9,-1.4 9.9,-1.1 11.5,-1.1 11.5,-1.4
  Top Layer, Top region: 9.9,-0.9 9.9,-0.6 11.5,-0.6 11.5,-0.9
  Top Layer, Top region: 9.9,-0.4 9.9,-0.1 11.5,-0.1 11.5,-0.4
  Top Layer, Top region: 9.9,0.1 9.9,0.4 11.5,0.4 11.5,0.1
  Top Layer, Top region: 9.9,0.6 9.9,0.9 11.5,0.9 11.5,0.6
  Top Layer, Top region: 9.9,1.1 9.9,1.4 11.5,1.4 11.5,1.1
  Top Layer, Top region: 9.9,1.6 9.9,1.9 11.5,1.9 11.5,1.6
  Top Layer, Top region: 9.9,2.1 9.9,2.4 11.5,2.4 11.5,2.1
  Top Layer, Top region: 9.9,2.6 9.9,2.9 11.5,2.9 11.5,2.6
  Top Layer, Top region: 9.9,3.1 9.9,3.4 11.5,3.4 11.5,3.1
  Top Layer, Top region: 9.9,3.6 9.9,3.9 11.5,3.9 11.5,3.6
  Top Layer, Top region: 9.9,4.1 9.9,4.4 11.5,4.4 11.5,4.1
  Top Layer, Top region: 9.9,4.6 9.9,4.9 11.5,4.9 11.5,4.6
  Top Layer, Top region: 9.9,5.1 9.9,5.4 11.5,5.4 11.5,5.1
  Top Layer, Top region: 9.9,5.6 9.9,5.9 11.5,5.9 11.5,5.6
  Top Layer, Top region: 9.9,6.1 9.9,6.4 11.5,6.4 11.5,6.1
  Top Layer, Top region: 9.9,6.6 9.9,6.9 11.5,6.9 11.5,6.6
  Top Layer, Top region: 9.9,7.1 9.9,7.4 11.5,7.4 11.5,7.1
  Top Layer, Top region: 9.9,7.6 9.9,7.9 11.5,7.9 11.5,7.6
  Top Layer, Top region: 9.9,8.1 9.9,8.4 11.5,8.4 11.5,8.1
  Top Layer, Top region: 9.9,8.6 9.9,8.9 11.5,8.9 11.5,8.6
  Top Layer, Top region: 8.6,11.5 8.9,11.5 8.9,9.9 8.6,9.9
  Top Layer, Top region: 8.1,11.5 8.4,11.5 8.4,9.9 8.1,9.9
  Top Layer, Top region: 7.6,11.5 7.9,11.5 7.9,9.9 7.6,9.9
  Top Layer, Top region: 7.1,11.5 7.4,11.5 7.4,9.9 7.1,9.9
  Top Layer, Top region: 6.6,11.5 6.9,11.5 6.9,9.9 6.6,9.9
  Top Layer, Top region: 6.1,11.5 6.4,11.5 6.4,9.9 6.1,9.9
  Top Layer, Top region: 5.6,11.5 5.9,11.5 5.9,9.9 5.6,9.9
  Top Layer, Top region: 5.1,11.5 5.4,11.5 5.4,9.9 5.1,9.9
  Top Layer, Top region: 4.6,11.5 4.9,11.5 4.9,9.9 4.6,9.9
  Top Layer, Top region: 4.1,11.5 4.4,11.5 4.4,9.9 4.1,9.9
  Top Layer, Top region: 3.6,11.5 3.9,11.5 3.9,9.9 3.6,9.9
  Top Layer, Top region: 3.1,11.5 3.4,11.5 3.4,9.9 3.1,9.9
  Top Layer, Top region: 2.6,11.5 2.9,11.5 2.9,9.9 2.6,9.9
  Top Layer, Top region: 2.1,11.5 2.4,11.5 2.4,9.9 2.1,9.9
  Top Layer, Top region: 1.6,11.5 1.9,11.5 1.9,9.9 1.6,9.9
  Top Layer, Top region: 1.1,11.5 1.4,11.5 1.4,9.9 1.1,9.9
  Top Layer, Top region: 0.6,11.5 0.9,11.5 0.9,9.9 0.6,9.9
  Top Layer, Top region: 0.1,11.5 0.4,11.5 0.4,9.9 0.1,9.9
  Top Layer, Top region: -0.4,11.5 -0.1,11.5 -0.1,9.9 -0.4,9.9
  Top Layer, Top region: -0.9,11.5 -0.6,11.5 -0.6,9.9 -0.9,9.9
  Top Layer, Top region: -1.4,11.5 -1.1,11.5 -1.1,9.9 -1.4,9.9
  Top Layer, Top region: -1.9,11.5 -1.6,11.5 -1.6,9.9 -1.9,9.9
  Top Layer, Top region: -2.4,11.5 -2.1,11.5 -2.1,9.9 -2.4,9.9
  Top Layer, Top region: -2.9,11.5 -2.6,11.5 -2.6,9.9 -2.9,9.9
  Top Layer, Top region: -3.4,11.5 -3.1,11.5 -3.1,9.9 -3.4,9.9
  Top Layer, Top region: -3.9,11.5 -3.6,11.5 -3.6,9.9 -3.9,9.9
  Top Layer, Top region: -4.4,11.5 -4.1,11.5 -4.1,9.9 -4.4,9.9
  Top Layer, Top region: -4.9,11.5 -4.6,11.5 -4.6,9.9 -4.9,9.9
  Top Layer, Top region: -5.4,11.5 -5.1,11.5 -5.1,9.9 -5.4,9.9
  Top Layer, Top region: -5.9,11.5 -5.6,11.5 -5.6,9.9 -5.9,9.9
  Top Layer, Top region: -6.4,11.5 -6.1,11.5 -6.1,9.9 -6.4,9.9
  Top Layer, Top region: -6.9,11.5 -6.6,11.5 -6.6,9.9 -6.9,9.9
  Top Layer, Top region: -7.4,11.5 -7.1,11.5 -7.1,9.9 -7.4,9.9
  Top Layer, Top region: -7.9,11.5 -7.6,11.5 -7.6,9.9 -7.9,9.9
  Top Layer, Top region: -8.4,11.5 -8.1,11.5 -8.1,9.9 -8.4,9.9
  Top Layer, Top region: -8.9,11.5 -8.6,11.5 -8.6,9.9 -8.9,9.9
  Top Layer, Top region: -2.85,2.85 2.85,2.85 2.85,-2.85 -2.85,-2.85
  Top Layer, Top region: -11.5,-8.9 -11.5,-8.6 -9.9,-8.6 -9.9,-8.9
  Top Layer, Top region: -11.5,-6.4 -11.5,-6.1 -9.9,-6.1 -9.9,-6.4
  Top Layer, Top region: -11.5,-6.9 -11.5,-6.6 -9.9,-6.6 -9.9,-6.9
  Top Layer, Top region: -11.5,-7.4 -11.5,-7.1 -9.9,-7.1 -9.9,-7.4
  Top Layer, Top region: -11.5,-7.9 -11.5,-7.6 -9.9,-7.6 -9.9,-7.9
  Top Layer, Top region: -11.5,-4.4 -11.5,-4.1 -9.9,-4.1 -9.9,-4.4
  Top Layer, Top region: -11.5,-4.9 -11.5,-4.6 -9.9,-4.6 -9.9,-4.9
  Top Layer, Top region: -11.5,-5.4 -11.5,-5.1 -9.9,-5.1 -9.9,-5.4
  Top Layer, Top region: -11.5,-5.9 -11.5,-5.6 -9.9,-5.6 -9.9,-5.9
  Top Layer, Top region: -11.5,-2.4 -11.5,-2.1 -9.9,-2.1 -9.9,-2.4
  Top Layer, Top region: -11.5,-2.9 -11.5,-2.6 -9.9,-2.6 -9.9,-2.9
  Top Layer, Top region: -11.5,-3.4 -11.5,-3.1 -9.9,-3.1 -9.9,-3.4
  Top Layer, Top region: -11.5,-3.9 -11.5,-3.6 -9.9,-3.6 -9.9,-3.9
  Top Layer, Top region: -11.5,-0.4 -11.5,-0.1 -9.9,-0.1 -9.9,-0.4
  Top Layer, Top region: -11.5,-0.9 -11.5,-0.6 -9.9,-0.6 -9.9,-0.9
  Top Layer, Top region: -11.5,-1.4 -11.5,-1.1 -9.9,-1.1 -9.9,-1.4
  Top Layer, Top region: -11.5,-1.9 -11.5,-1.6 -9.9,-1.6 -9.9,-1.9
  Top Layer, Top region: -11.5,1.6 -11.5,1.9 -9.9,1.9 -9.9,1.6
  Top Layer, Top region: -11.5,1.1 -11.5,1.4 -9.9,1.4 -9.9,1.1
  Top Layer, Top region: -11.5,0.6 -11.5,0.9 -9.9,0.9 -9.9,0.6
  Top Layer, Top region: -11.5,0.1 -11.5,0.4 -9.9,0.4 -9.9,0.1
  Top Layer, Top region: -11.5,3.6 -11.5,3.9 -9.9,3.9 -9.9,3.6
  Top Layer, Top region: -11.5,3.1 -11.5,3.4 -9.9,3.4 -9.9,3.1
  Top Layer, Top region: -11.5,2.6 -11.5,2.9 -9.9,2.9 -9.9,2.6
  Top Layer, Top region: -11.5,2.1 -11.5,2.4 -9.9,2.4 -9.9,2.1
  Top Layer, Top region: -11.5,5.6 -11.5,5.9 -9.9,5.9 -9.9,5.6
  Top Layer, Top region: -11.5,5.1 -11.5,5.4 -9.9,5.4 -9.9,5.1
  Top Layer, Top region: -11.5,4.6 -11.5,4.9 -9.9,4.9 -9.9,4.6
  Top Layer, Top region: -11.5,4.1 -11.5,4.4 -9.9,4.4 -9.9,4.1
  Top Layer, Top region: -11.5,7.6 -11.5,7.9 -9.9,7.9 -9.9,7.6
  Top Layer, Top region: -11.5,7.1 -11.5,7.4 -9.9,7.4 -9.9,7.1
  Top Layer, Top region: -11.5,6.6 -11.5,6.9 -9.9,6.9 -9.9,6.6
  Top Layer, Top region: -11.5,6.1 -11.5,6.4 -9.9,6.4 -9.9,6.1
  Top Layer, Top region: -11.5,8.6 -11.5,8.9 -9.9,8.9 -9.9,8.6
  Top Layer, Top region: -11.5,-8.4 -11.5,-8.1 -9.9,-8.1 -9.9,-8.4
  Top Layer, Top region: -11.5,8.1 -11.5,8.4 -9.9,8.4 -9.9,8.1
  Top Layer, Top region: -8.9,-9.9 -8.6,-9.9 -8.6,-11.5 -8.9,-11.5
  Top Layer, Top region: -7.9,-9.9 -7.6,-9.9 -7.6,-11.5 -7.9,-11.5
  Top Layer, Top region: -7.4,-9.9 -7.1,-9.9 -7.1,-11.5 -7.4,-11.5
  Top Layer, Top region: -6.9,-9.9 -6.6,-9.9 -6.6,-11.5 -6.9,-11.5
  Top Layer, Top region: -6.4,-9.9 -6.1,-9.9 -6.1,-11.5 -6.4,-11.5
  Top Layer, Top region: -5.9,-9.9 -5.6,-9.9 -5.6,-11.5 -5.9,-11.5
  Top Layer, Top region: -5.4,-9.9 -5.1,-9.9 -5.1,-11.5 -5.4,-11.5
  Top Layer, Top region: -4.9,-9.9 -4.6,-9.9 -4.6,-11.5 -4.9,-11.5
  Top Layer, Top region: -4.4,-9.9 -4.1,-9.9 -4.1,-11.5 -4.4,-11.5
  Top Layer, Top region: -3.9,-9.9 -3.6,-9.9 -3.6,-11.5 -3.9,-11.5
  Top Layer, Top region: -3.4,-9.9 -3.1,-9.9 -3.1,-11.5 -3.4,-11.5
  Top Layer, Top region: -2.9,-9.9 -2.6,-9.9 -2.6,-11.5 -2.9,-11.5
  Top Layer, Top region: -2.4,-9.9 -2.1,-9.9 -2.1,-11.5 -2.4,-11.5
  Top Layer, Top region: -1.9,-9.9 -1.6,-9.9 -1.6,-11.5 -1.9,-11.5
  Top Layer, Top region: -1.4,-9.9 -1.1,-9.9 -1.1,-11.5 -1.4,-11.5
  Top Layer, Top region: -0.9,-9.9 -0.6,-9.9 -0.6,-11.5 -0.9,-11.5
  Top Layer, Top region: -0.4,-9.9 -0.1,-9.9 -0.1,-11.5 -0.4,-11.5
  Top Layer, Top region: 0.1,-9.9 0.4,-9.9 0.4,-11.5 0.1,-11.5
  Top Layer, Top region: 0.6,-9.9 0.9,-9.9 0.9,-11.5 0.6,-11.5
  Top Layer, Top region: 1.1,-9.9 1.4,-9.9 1.4,-11.5 1.1,-11.5
  Top Layer, Top region: 1.6,-9.9 1.9,-9.9 1.9,-11.5 1.6,-11.5
  Top Layer, Top region: 2.1,-9.9 2.4,-9.9 2.4,-11.5 2.1,-11.5
  Top Layer, Top region: 2.6,-9.9 2.9,-9.9 2.9,-11.5 2.6,-11.5
  Top Layer, Top region: 3.1,-9.9 3.4,-9.9 3.4,-11.5 3.1,-11.5
  Top Layer, Top region: 3.6,-9.9 3.9,-9.9 3.9,-11.5 3.6,-11.5
  Top Layer, Top region: 4.1,-9.9 4.4,-9.9 4.4,-11.5 4.1,-11.5
  Top Layer, Top region: 4.6,-9.9 4.9,-9.9 4.9,-11.5 4.6,-11.5
  Top Layer, Top region: 5.1,-9.9 5.4,-9.9 5.4,-11.5 5.1,-11.5
  Top Layer, Top region: 5.6,-9.9 5.9,-9.9 5.9,-11.5 5.6,-11.5
  Top Layer, Top region: 6.1,-9.9 6.4,-9.9 6.4,-11.5 6.1,-11.5
  Top Layer, Top region: 6.6,-9.9 6.9,-9.9 6.9,-11.5 6.6,-11.5
  Top Layer, Top region: 7.1,-9.9 7.4,-9.9 7.4,-11.5 7.1,-11.5
  Top Layer, Top region: 7.6,-9.9 7.9,-9.9 7.9,-11.5 7.6,-11.5
  Top Layer, Top region: 8.6,-9.9 8.9,-9.9 8.9,-11.5 8.6,-11.5
  Top Layer, Top region: -8.4,-9.9 -8.1,-9.9 -8.1,-11.5 -8.4,-11.5
  Top Layer, Top region: 8.1,-9.9 8.4,-9.9 8.4,-11.5 8.1,-11.5
  Top Layer, Top region: 9.9,-8.9 9.9,-8.6 11.5,-8.6 11.5,-8.9
  Top Layer, Top region: 9.9,-7.9 9.9,-7.6 11.5,-7.6 11.5,-7.9
  Top Layer, Top region: 9.9,-7.4 9.9,-7.1 11.5,-7.1 11.5,-7.4
  Top Layer, Top region: 9.9,-6.9 9.9,-6.6 11.5,-6.6 11.5,-6.9
  Top Layer, Top region: 9.9,-6.4 9.9,-6.1 11.5,-6.1 11.5,-6.4
  Top Layer, Top region: 9.9,-5.9 9.9,-5.6 11.5,-5.6 11.5,-5.9
  Top Layer, Top region: 9.9,-5.4 9.9,-5.1 11.5,-5.1 11.5,-5.4
  Top Layer, Top region: 9.9,-4.9 9.9,-4.6 11.5,-4.6 11.5,-4.9
  Top Layer, Top region: 9.9,-4.4 9.9,-4.1 11.5,-4.1 11.5,-4.4
  Top Layer, Top region: 9.9,-3.9 9.9,-3.6 11.5,-3.6 11.5,-3.9
  Top Layer, Top region: 9.9,-3.4 9.9,-3.1 11.5,-3.1 11.5,-3.4
  Top Layer, Top region: 9.9,-2.9 9.9,-2.6 11.5,-2.6 11.5,-2.9
  Top Layer, Top region: 9.9,-2.4 9.9,-2.1 11.5,-2.1 11.5,-2.4
  Top Layer, Top region: 9.9,-1.9 9.9,-1.6 11.5,-1.6 11.5,-1.9
  Top Layer, Top region: 9.9,-1.4 9.9,-1.1 11.5,-1.1 11.5,-1.4
  Top Layer, Top region: 9.9,-0.9 9.9,-0.6 11.5,-0.6 11.5,-0.9
  Top Layer, Top region: 9.9,-0.4 9.9,-0.1 11.5,-0.1 11.5,-0.4
  Top Layer, Top region: 9.9,0.1 9.9,0.4 11.5,0.4 11.5,0.1
  Top Layer, Top region: 9.9,0.6 9.9,0.9 11.5,0.9 11.5,0.6
  Top Layer, Top region: 9.9,1.1 9.9,1.4 11.5,1.4 11.5,1.1
  Top Layer, Top region: 9.9,1.6 9.9,1.9 11.5,1.9 11.5,1.6
  Top Layer, Top region: 9.9,2.1 9.9,2.4 11.5,2.4 11.5,2.1
  Top Layer, Top region: 9.9,2.6 9.9,2.9 11.5,2.9 11.5,2.6
  Top Layer, Top region: 9.9,3.1 9.9,3.4 11.5,3.4 11.5,3.1
  Top Layer, Top region: 9.9,3.6 9.9,3.9 11.5,3.9 11.5,3.6
  Top Layer, Top region: 9.9,4.1 9.9,4.4 11.5,4.4 11.5,4.1
  Top Layer, Top region: 9.9,4.6 9.9,4.9 11.5,4.9 11.5,4.6
  Top Layer, Top region: 9.9,5.1 9.9,5.4 11.5,5.4 11.5,5.1
  Top Layer, Top region: 9.9,5.6 9.9,5.9 11.5,5.9 11.5,5.6
  Top Layer, Top region: 9.9,6.1 9.9,6.4 11.5,6.4 11.5,6.1
  Top Layer, Top region: 9.9,6.6 9.9,6.9 11.5,6.9 11.5,6.6
  Top Layer, Top region: 9.9,7.1 9.9,7.4 11.5,7.4 11.5,7.1
  Top Layer, Top region: 9.9,7.6 9.9,7.9 11.5,7.9 11.5,7.6
  Top Layer, Top region: 9.9,8.6 9.9,8.9 11.5,8.9 11.5,8.6
  Top Layer, Top region: 9.9,-8.4 9.9,-8.1 11.5,-8.1 11.5,-8.4
  Top Layer, Top region: 9.9,8.1 9.9,8.4 11.5,8.4 11.5,8.1
  Top Layer, Top region: -2.85,2.85 2.85,2.85 2.85,-2.85 -2.85,-2.85
  Top Layer, Top region: -8.9,11.5 -8.6,11.5 -8.6,9.9 -8.9,9.9
  Top Layer, Top region: -6.4,11.5 -6.1,11.5 -6.1,9.9 -6.4,9.9
  Top Layer, Top region: -6.9,11.5 -6.6,11.5 -6.6,9.9 -6.9,9.9
  Top Layer, Top region: -7.4,11.5 -7.1,11.5 -7.1,9.9 -7.4,9.9
  Top Layer, Top region: -7.9,11.5 -7.6,11.5 -7.6,9.9 -7.9,9.9
  Top Layer, Top region: -4.4,11.5 -4.1,11.5 -4.1,9.9 -4.4,9.9
  Top Layer, Top region: -4.9,11.5 -4.6,11.5 -4.6,9.9 -4.9,9.9
  Top Layer, Top region: -5.4,11.5 -5.1,11.5 -5.1,9.9 -5.4,9.9
  Top Layer, Top region: -5.9,11.5 -5.6,11.5 -5.6,9.9 -5.9,9.9
  Top Layer, Top region: -2.4,11.5 -2.1,11.5 -2.1,9.9 -2.4,9.9
  Top Layer, Top region: -2.9,11.5 -2.6,11.5 -2.6,9.9 -2.9,9.9
  Top Layer, Top region: -3.4,11.5 -3.1,11.5 -3.1,9.9 -3.4,9.9
  Top Layer, Top region: -3.9,11.5 -3.6,11.5 -3.6,9.9 -3.9,9.9
  Top Layer, Top region: -0.4,11.5 -0.1,11.5 -0.1,9.9 -0.4,9.9
  Top Layer, Top region: -0.9,11.5 -0.6,11.5 -0.6,9.9 -0.9,9.9
  Top Layer, Top region: -1.4,11.5 -1.1,11.5 -1.1,9.9 -1.4,9.9
  Top Layer, Top region: -1.9,11.5 -1.6,11.5 -1.6,9.9 -1.9,9.9
  Top Layer, Top region: 1.6,11.5 1.9,11.5 1.9,9.9 1.6,9.9
  Top Layer, Top region: 1.1,11.5 1.4,11.5 1.4,9.9 1.1,9.9
  Top Layer, Top region: 0.6,11.5 0.9,11.5 0.9,9.9 0.6,9.9
  Top Layer, Top region: 0.1,11.5 0.4,11.5 0.4,9.9 0.1,9.9
  Top Layer, Top region: 3.6,11.5 3.9,11.5 3.9,9.9 3.6,9.9
  Top Layer, Top region: 3.1,11.5 3.4,11.5 3.4,9.9 3.1,9.9
  Top Layer, Top region: 2.6,11.5 2.9,11.5 2.9,9.9 2.6,9.9
  Top Layer, Top region: 2.1,11.5 2.4,11.5 2.4,9.9 2.1,9.9
  Top Layer, Top region: 5.6,11.5 5.9,11.5 5.9,9.9 5.6,9.9
  Top Layer, Top region: 5.1,11.5 5.4,11.5 5.4,9.9 5.1,9.9
  Top Layer, Top region: 4.6,11.5 4.9,11.5 4.9,9.9 4.6,9.9
  Top Layer, Top region: 4.1,11.5 4.4,11.5 4.4,9.9 4.1,9.9
  Top Layer, Top region: 7.6,11.5 7.9,11.5 7.9,9.9 7.6,9.9
  Top Layer, Top region: 7.1,11.5 7.4,11.5 7.4,9.9 7.1,9.9
  Top Layer, Top region: 6.6,11.5 6.9,11.5 6.9,9.9 6.6,9.9
  Top Layer, Top region: 6.1,11.5 6.4,11.5 6.4,9.9 6.1,9.9
  Top Layer, Top region: 8.6,11.5 8.9,11.5 8.9,9.9 8.6,9.9
  Top Layer, Top region: -8.4,11.5 -8.1,11.5 -8.1,9.9 -8.4,9.9
  Top Layer, Top region: 8.1,11.5 8.4,11.5 8.4,9.9 8.1,9.9
  silkscreen extent -10.9,-9.5 9.5,9.5
EVM1DSX30B [mm]
  rect 1.5x1.3 smd: 1(-1.525,1.45) 3(-1.525,-1.45)
  rect 1.1x2.4 smd: 2(2.275,0)
  silkscreen extent -2.82,-1.9 2.28,1.9
EXT-CONN [mm]
  rect 1.7x1.7 hole 1.1: 1(-6.35,-1.27)
  round 1.7 hole 1.1: 2(-6.35,1.27) 3(-3.81,-1.27) 4(-3.81,1.27) 5(-1.27,-1.27) 6(-1.27,1.27) 7(1.27,-1.27) 8(1.27,1.27) 9(3.81,-1.27) 10(3.81,1.27) 11(6.35,-1.27) 12(6.35,1.27)
  silkscreen extent -7.62,-2.54 7.62,2.54
IDC10 [mm]
  rect 1.5x1.5 hole 1: 1(5.08,1.27)
  round 1.6 hole 1: 2(5.08,-1.27) 3(2.54,1.27) 4(2.54,-1.27) 5(0,1.27) 6(0,-1.27) 7(-2.54,1.27) 8(-2.54,-1.27) 9(-5.08,1.27) 10(-5.08,-1.27)
  silkscreen extent -10.16,-4.44 10.16,4.44
IND_0805 [mm]
  rect 1.2x1.45 smd: 1(-0.85,0) 2(0.85,0)
IND_1812 [mm]
  rect 1.4x3.4 smd: 1(-2.05,0) 2(2.05,0)
  silkscreen extent -0.8,-1.6 0.8,1.6
IND_FERRITE_BEAD [mm]
  round 1.35 hole 0.8: 1(-3.25,0) 2(3.25,0)
  silkscreen extent -1.7,-0.95 1.7,0.95
IND_FERRITE_CORE [mm]
  rect 2.7x3.6 smd: 1(-4.15,0) 2(4.15,0)
  silkscreen extent -5.2,-5.2 5.2,5.2
JX2 [mm]
  rect 2.3x2.3 hole 1.3: 1(-1.905,0)
  round 2.3 hole 1.3: 2(1.905,0)
  silkscreen extent -3.81,-1.4 3.81,1.4
LD3985 [mm]
  rect 1.1x0.6 smd: 1(-1.316,0.785) 2(-1.316,-0.165) 3(-1.316,-1.115) 4(1.384,-1.115) 5(1.384,0.785)
  silkscreen extent -1.93,-1.66 0.43,1.66
LM1085-3.3 [mm]
  rect 3x1.45 smd: 1(-6.3,2.54) 2(-6.3,0) 3(-6.3,-2.54)
  rect 9x10.6 smd: 4(3.3,0)
  silkscreen extent -7.61,-5.1 -1.7,5.1
LT1117CST-3.3 [mm]
  rect 2.15x0.95 smd: 1(-2.9,2.215) 2(-2.9,-0.085) 3(-2.9,-2.385)
  rect 2.15x3.25 smd: 4(2.9,-0.085)
  silkscreen extent -3.86,-3.38 1.4,3.38
LT-UD-16_N [mm] "QFN, 16-Leads, Body 3x3mm, Pitch 0.5mm, Thermal Pad 1.45x1.45mm, IPC Medium Density"
  oval 0.9x0.25 smd: 1(-1.45,0.75) 2(-1.45,0.25) 3(-1.45,-0.25) 4(-1.45,-0.75) 9(1.45,-0.75) 10(1.45,-0.25) 11(1.45,0.25) 12(1.45,0.75)
  oval 0.25x0.9 smd: 5(-0.75,-1.45) 6(-0.25,-1.45) 7(0.25,-1.45) 8(0.75,-1.45) 13(0.75,1.45) 14(0.25,1.45) 15(-0.25,1.45) 16(-0.75,1.45)
  rect 1.45x1.45 smd: 17(0,0)
  silkscreen extent -2.47,-1.7 1.7,1.7, body extent -1.55,-1.55 1.55,1.55, height 0.8
LTC2208CUP [mm]
  oval 0.85x0.3 smd: 1(-4.147,3.75) 2(-4.147,3.25) 3(-4.147,2.75) 4(-4.147,2.25) 5(-4.147,1.75) 6(-4.147,1.25) 7(-4.147,0.75) 8(-4.147,0.25) 9(-4.147,-0.25) 10(-4.147,-0.75) 11(-4.147,-1.25) 12(-4.147,-1.75) 13(-4.147,-2.25) 14(-4.147,-2.75) 15(-4.147,-3.25) 16(-4.147,-3.75) 33(4.753,-3.75) 34(4.753,-3.25) 35(4.753,-2.75) 36(4.753,-2.25) 37(4.753,-1.75) 38(4.753,-1.25) 39(4.753,-0.75) 40(4.753,-0.25) 41(4.753,0.25) 42(4.753,0.75) 43(4.753,1.25) 44(4.753,1.75) 45(4.753,2.25) 46(4.753,2.75) 47(4.753,3.25) 48(4.753,3.75)
  oval 0.3x0.85 smd: 17(-3.447,-4.45) 18(-2.947,-4.45) 19(-2.447,-4.45) 20(-1.947,-4.45) 21(-1.447,-4.45) 22(-0.947,-4.45) 23(-0.447,-4.45) 24(0.053,-4.45) 25(0.553,-4.45) 26(1.053,-4.45) 27(1.553,-4.45) 28(2.053,-4.45) 29(2.553,-4.45) 30(3.053,-4.45) 31(3.553,-4.45) 32(4.053,-4.45) 49(4.053,4.45) 50(3.553,4.45) 51(3.053,4.45) 52(2.553,4.45) 53(2.053,4.45) 54(1.553,4.45) 55(1.053,4.45) 56(0.553,4.45) 57(0.053,4.45) 58(-0.447,4.45) 59(-0.947,4.45) 60(-1.447,4.45) 61(-1.947,4.45) 62(-2.447,4.45) 63(-2.947,4.45) 64(-3.447,4.45)
  rect 7.4x7.4 smd: 65(0.303,0)
  silkscreen extent -5.18,-4.5 4.8,4.6
NV7050SA [mm]
  rect 2x1.8 smd: 1(-1.948,2.17) 2(-1.948,-0.37) 3(-1.948,-2.91) 4(2.252,-2.91) 5(2.252,-0.37) 6(2.252,2.17)
  silkscreen extent -3.51,-4.38 3.51,4.38
OPA2674I [mm]
  rect 2x0.6 smd: 1(-2.7,3.81) 2(-2.7,2.54) 3(-2.7,1.27) 4(-2.7,0) 5(-2.7,-1.27) 6(-2.7,-2.54) 7(-2.7,-3.81) 8(2.7,-3.81) 9(2.7,-2.54) 10(2.7,-1.27) 11(2.7,0) 12(2.7,1.27) 13(2.7,2.54) 14(2.7,3.81)
  silkscreen extent -1.3,-4.3 1.3,4.3
PAM8403 [mm]
  rect 2x0.6 smd: 1(-3.175,4.445) 2(-3.175,3.175) 3(-3.175,1.905) 4(-3.175,0.635) 5(-3.175,-0.635) 6(-3.175,-1.905) 7(-3.175,-3.175) 8(-3.175,-4.445) 9(3.175,-4.445) 10(3.175,-3.175) 11(3.175,-1.905) 12(3.175,-0.635) 13(3.175,0.635) 14(3.175,1.905) 15(3.175,3.175) 16(3.175,4.445)
  silkscreen extent -1.7,-5.15 1.7,5.15
R26-32.768 [mm]
  round 1.2 hole 0.6: 1(0,1.05) 2(0,-1.05)
  silkscreen extent -1.05,-0.53 1.05,0.48
RES6.5-3.4X1.9 [mm] "Resistor, Axial; Body 3.4 x 1.9 mm (LxDia. max), Lead Dia. 0.5 mm (max)"
  round 1.35 hole 0.8: 1(-3.25,0) 2(3.25,0)
  silkscreen extent -1.7,-0.95 1.7,0.95
RES_0603 [mm]
  rect 1.1x1 smd: 1(-0.85,0) 2(0.85,0)
RES_0805 [mm]
  rect 1.3x1.5 smd: 1(-0.95,0) 2(0.95,0)
RES_1206 [mm]
  rect 1.6x1.8 smd: 1(-1.4,0) 2(1.4,0)
  silkscreen extent -0.3,-0.8 0.3,0.8
SJ1-3523N [mm]
  oval 1.4x2.8 hole 0.8: 1(-0.511,0)
  oval 2.8x1.4 hole 0.8: 2(4.489,-5) 3(4.489,5)
  round 1.8 hole 1.2: 4(-3.011,5) 5(-0.511,5) 6(4.489,0) 7(-3.011,-5) 8(-0.511,-5)
  silkscreen extent -5.01,-6 7.19,6
ST1S10 [mm]
  rect 2x0.6 smd: 1(-2.7,1.905) 2(-2.7,0.635) 3(-2.7,-0.635) 4(-2.7,-1.905) 5(2.7,-1.905) 6(2.7,-0.635) 7(2.7,0.635) 8(2.7,1.905)
  rect 2.41x3.3 smd: 9(0,-0.1)
  silkscreen extent -1.32,-2.5 1.32,2.5
STM32H743VIT6 [mm]
  rect 1.6x0.3 smd: 1(-7.7,6) 2(-7.7,5.5) 3(-7.7,5) 4(-7.7,4.5) 5(-7.7,4) 6(-7.7,3.5) 7(-7.7,3) 8(-7.7,2.5) 9(-7.7,2) 10(-7.7,1.5) 11(-7.7,1) 12(-7.7,0.5) 13(-7.7,0) 14(-7.7,-0.5) 15(-7.7,-1) 16(-7.7,-1.5) 17(-7.7,-2) 18(-7.7,-2.5) 19(-7.7,-3) 20(-7.7,-3.5) 21(-7.7,-4) 22(-7.7,-4.5) 23(-7.7,-5) 24(-7.7,-5.5) 25(-7.7,-6) 51(7.7,-6) 52(7.7,-5.5) 53(7.7,-5) 54(7.7,-4.5) 55(7.7,-4) 56(7.7,-3.5) 57(7.7,-3) 58(7.7,-2.5) 59(7.7,-2) 60(7.7,-1.5) 61(7.7,-1) 62(7.7,-0.5) 63(7.7,0) 64(7.7,0.5) 65(7.7,1) 66(7.7,1.5) 67(7.7,2) 68(7.7,2.5) 69(7.7,3) 70(7.7,3.5) 71(7.7,4) 72(7.7,4.5) 73(7.7,5) 74(7.7,5.5) 75(7.7,6)
  rect 0.3x1.6 smd: 26(-6,-7.7) 27(-5.5,-7.7) 28(-5,-7.7) 29(-4.5,-7.7) 30(-4,-7.7) 31(-3.5,-7.7) 32(-3,-7.7) 33(-2.5,-7.7) 34(-2,-7.7) 35(-1.5,-7.7) 36(-1,-7.7) 37(-0.5,-7.7) 38(0,-7.7) 39(0.5,-7.7) 40(1,-7.7) 41(1.5,-7.7) 42(2,-7.7) 43(2.5,-7.7) 44(3,-7.7) 45(3.5,-7.7) 46(4,-7.7) 47(4.5,-7.7) 48(5,-7.7) 49(5.5,-7.7) 50(6,-7.7) 76(6,7.7) 77(5.5,7.7) 78(5,7.7) 79(4.5,7.7) 80(4,7.7) 81(3.5,7.7) 82(3,7.7) 83(2.5,7.7) 84(2,7.7) 85(1.5,7.7) 86(1,7.7) 87(0.5,7.7) 88(0,7.7) 89(-0.5,7.7) 90(-1,7.7) 91(-1.5,7.7) 92(-2,7.7) 93(-2.5,7.7) 94(-3,7.7) 95(-3.5,7.7) 96(-4,7.7) 97(-4.5,7.7) 98(-5,7.7) 99(-5.5,7.7) 100(-6,7.7)
  silkscreen extent -7.92,-6.5 6.5,6.85
TC3528-1411 [mm] "Capacitor, SM Tantalum; Body 3.5 x 2.8 mm (LxW typ)"
  rect 2x2.2 smd: 1(-1.5,0) 2(1.5,0)
  silkscreen extent -2.82,-1.5 1.85,1.63
TRANSF_ACORE [mm]
  rect 1x1.65 smd: 1(-3.3,2.4) 2(-3.3,0) 3(-3.3,-2.4) 4(3.3,-2.4) 5(3.3,0) 6(3.3,2.4)
  rect 1.65x0.76 smd: 7(-1.59,1.27) 8(-1.59,0) 9(-1.59,-1.27) 10(1.59,1.27) 11(1.59,-1.27)
  silkscreen extent -2.61,-3.21 2.61,3.13
TRANSF_ACORE2 [mm]
  rect 1x1.65 smd: 1(-3.3,2.4) 2(-3.3,0) 3(-3.3,-2.4) 4(3.3,-2.4) 5(3.3,0) 6(3.3,2.4)
  rect 1.65x0.76 smd: 7(-1.59,1.27) 8(-1.59,0) 9(-1.59,-1.27) 10(1.59,1.27) 11(1.59,-1.27)
  silkscreen extent -2.61,-3.21 2.61,3.13
TRANSF_ACORE2_1 [mm]
  rect 1x1.65 smd: 1(-3.3,2.4) 2(-3.3,0) 3(-3.3,-2.4) 4(3.3,-2.4) 5(3.3,0) 6(3.3,2.4)
  rect 1.65x0.76 smd: 7(-1.59,1.27) 8(-1.59,0) 9(-1.59,-1.27) 10(1.59,1.27) 11(1.59,-1.27)
  silkscreen extent -2.61,-3.21 2.61,3.13
TRANSF_ICORE [mm]
  rect 0.9x0.4 smd: 1(-1.39,0.59) 2(1.41,0.59) 3(-1.39,-0.56) 4(1.41,-0.56)
  silkscreen extent -2.04,-0.95 2.04,0.95
W25Q16 [mm]
  rect 2x0.6 smd: 1(-4.7,1.905) 2(-4.7,0.635) 3(-4.7,-0.635) 4(-4.7,-1.905) 5(4.7,-1.905) 6(4.7,-0.635) 7(4.7,0.635) 8(4.7,1.905)
  silkscreen extent -3.2,-2.6 3.2,2.6
WM8731 [mm]
  rect 1.8x0.4 smd: 1(-3.6,4.225) 2(-3.6,3.575) 3(-3.6,2.925) 4(-3.6,2.275) 5(-3.6,1.625) 6(-3.6,0.975) 7(-3.6,0.325) 8(-3.6,-0.325) 9(-3.6,-0.975) 10(-3.6,-1.625) 11(-3.6,-2.275) 12(-3.6,-2.925) 13(-3.6,-3.575) 14(-3.6,-4.225) 15(3.6,-4.225) 16(3.6,-3.575) 17(3.6,-2.925) 18(3.6,-2.275) 19(3.6,-1.625) 20(3.6,-0.975) 21(3.6,-0.325) 22(3.6,0.325) 23(3.6,0.975) 24(3.6,1.625) 25(3.6,2.275) 26(3.6,2.925) 27(3.6,3.575) 28(3.6,4.225)
  silkscreen extent -2.4,-5.2 2.4,5.2